# EAGLE board VNA (EAGLE 9.3.1), part 1 of 4
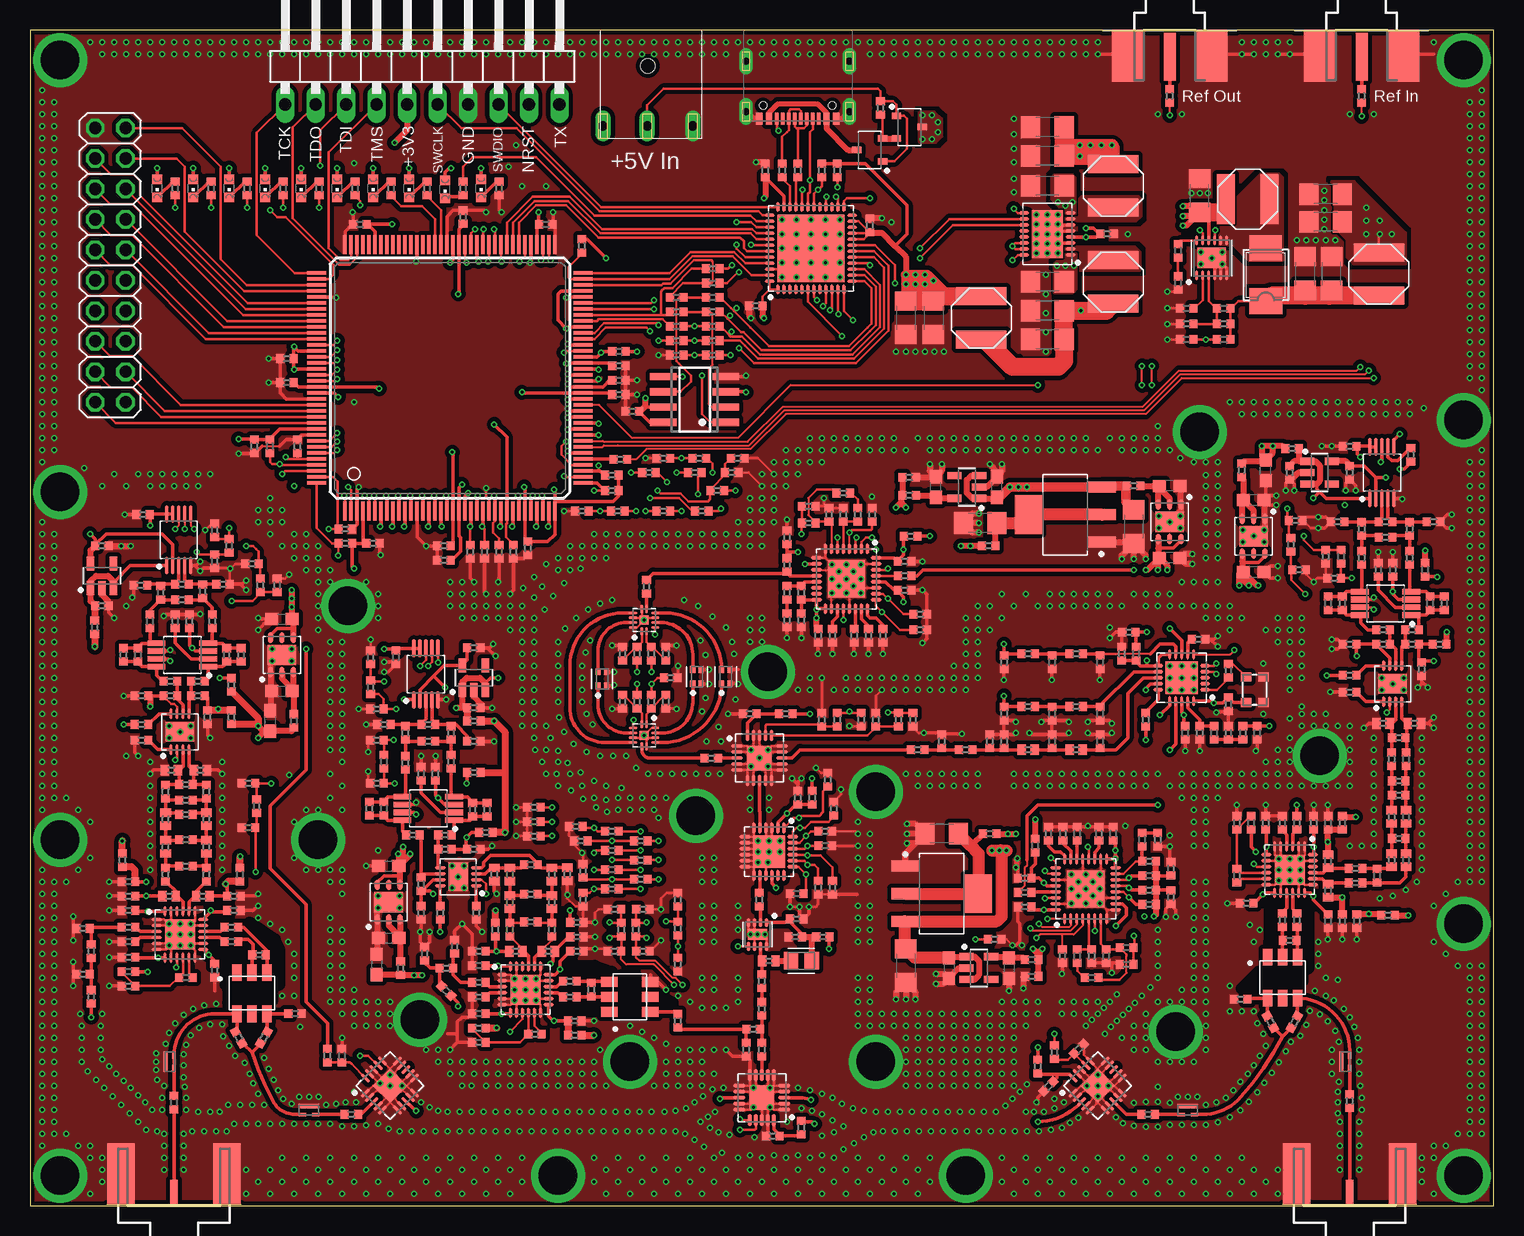
[diagram p0: board, top side]
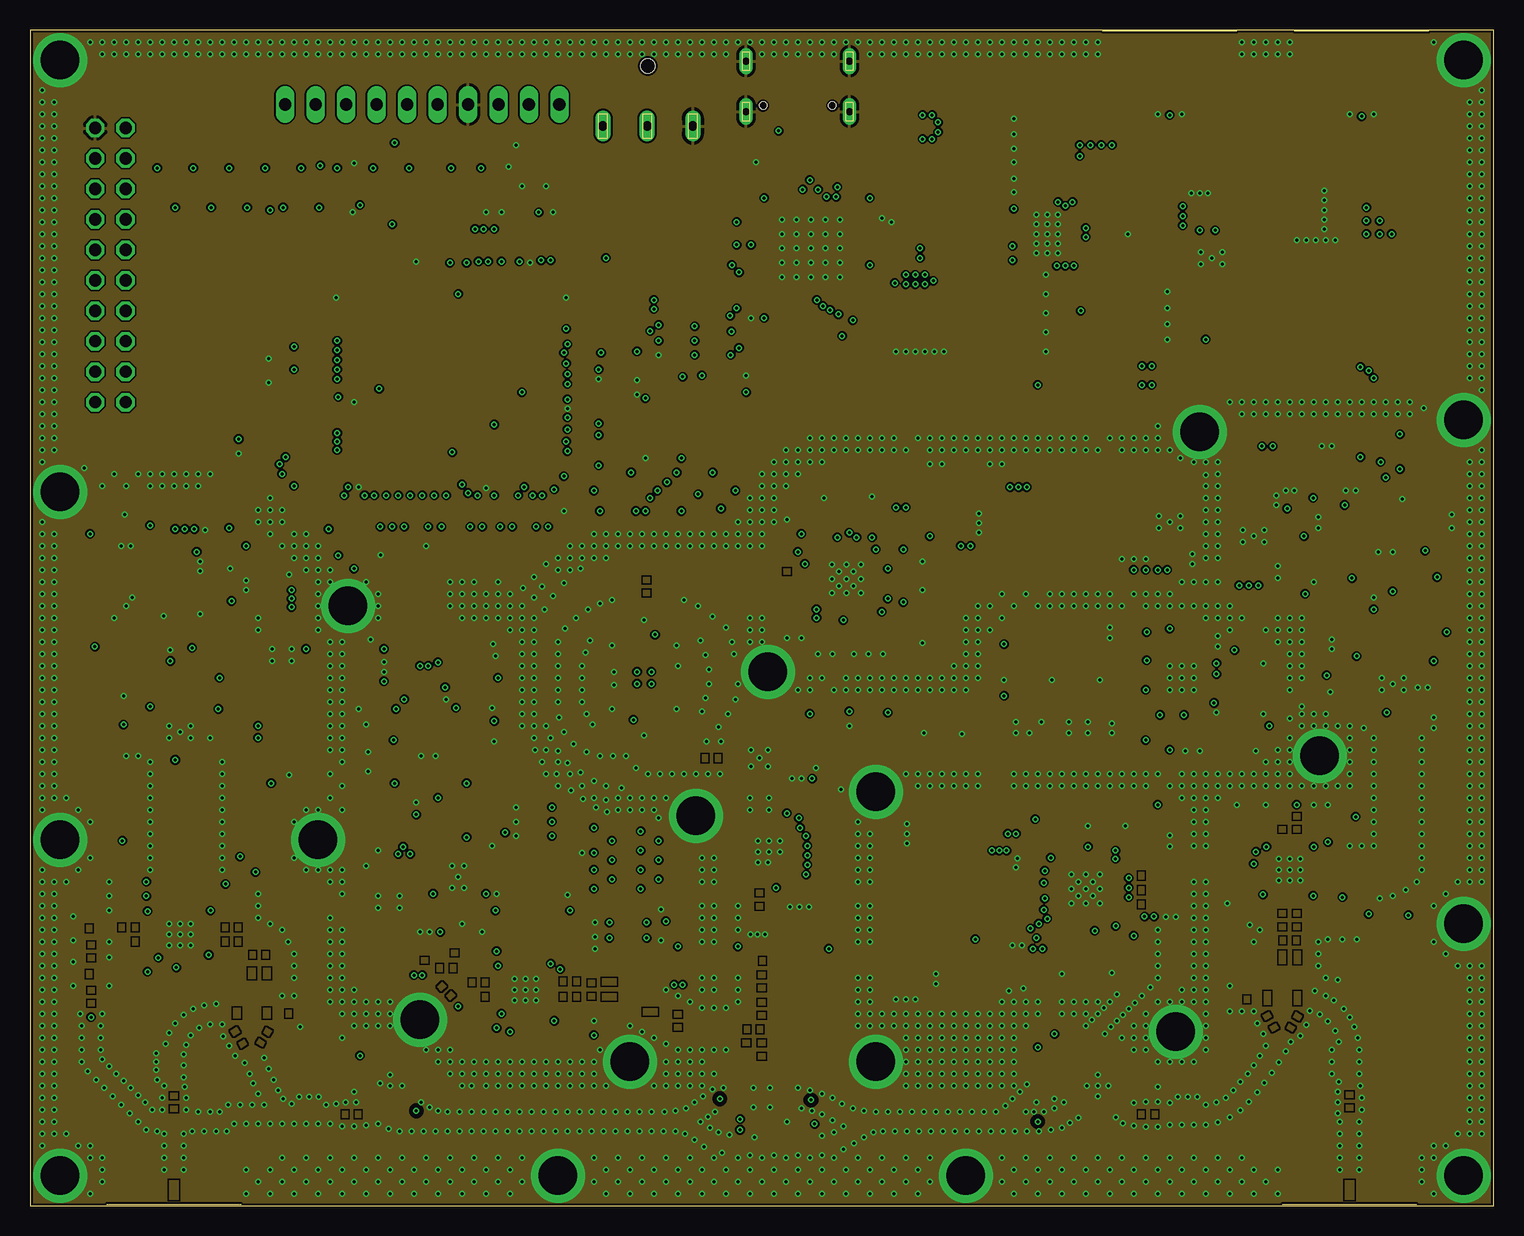
[diagram p1: board, inner layer Route2]
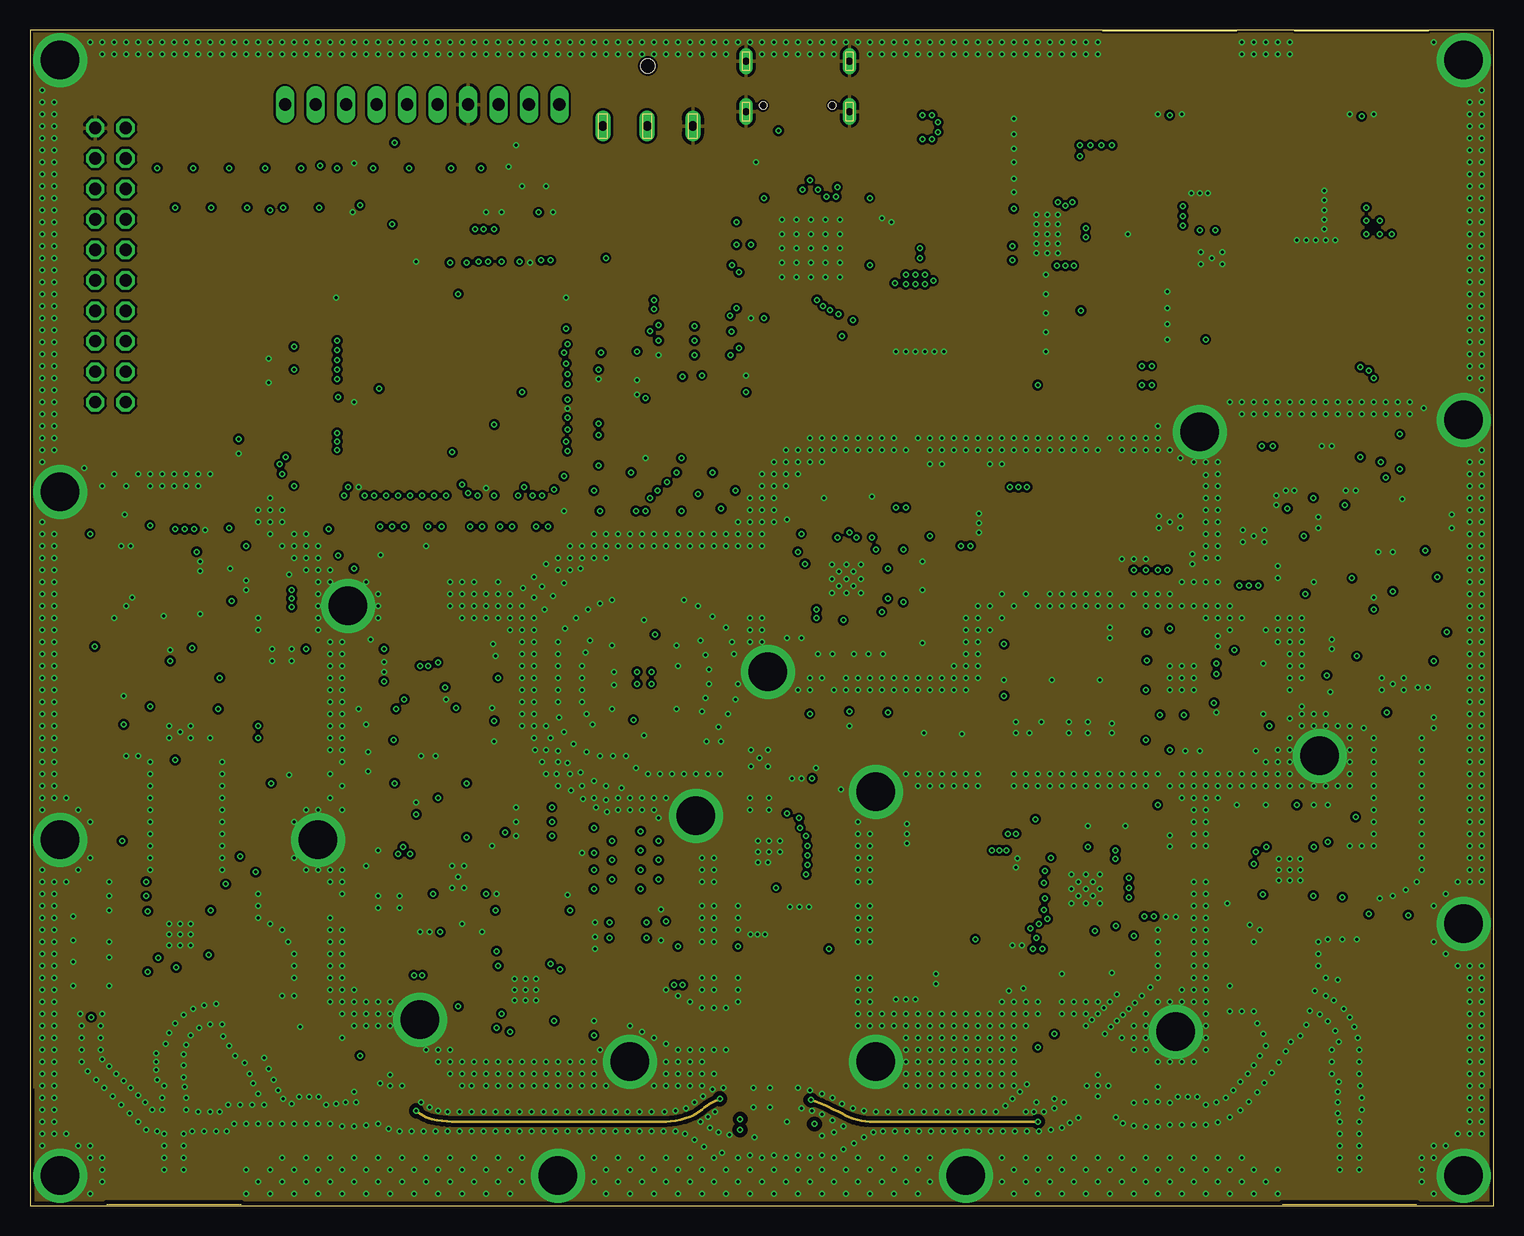
[diagram p2: board, inner layer Route3]
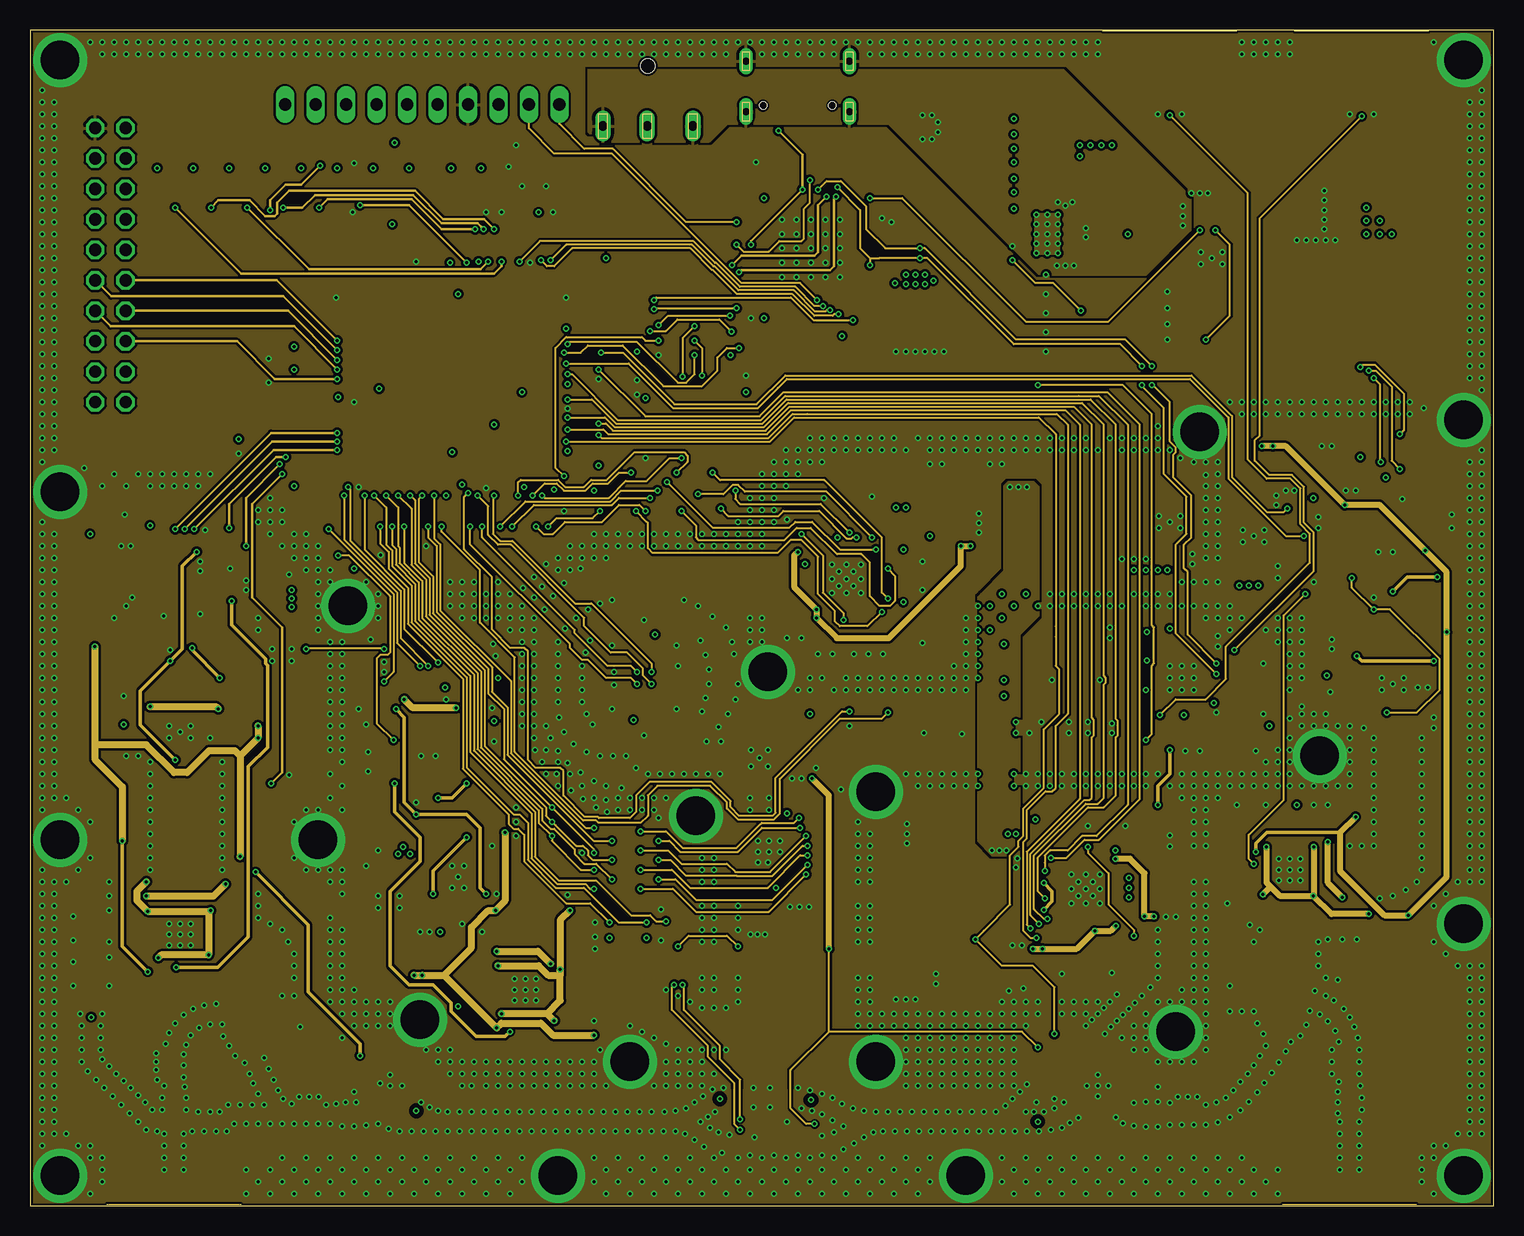
[diagram p3: board, inner layer Route14]
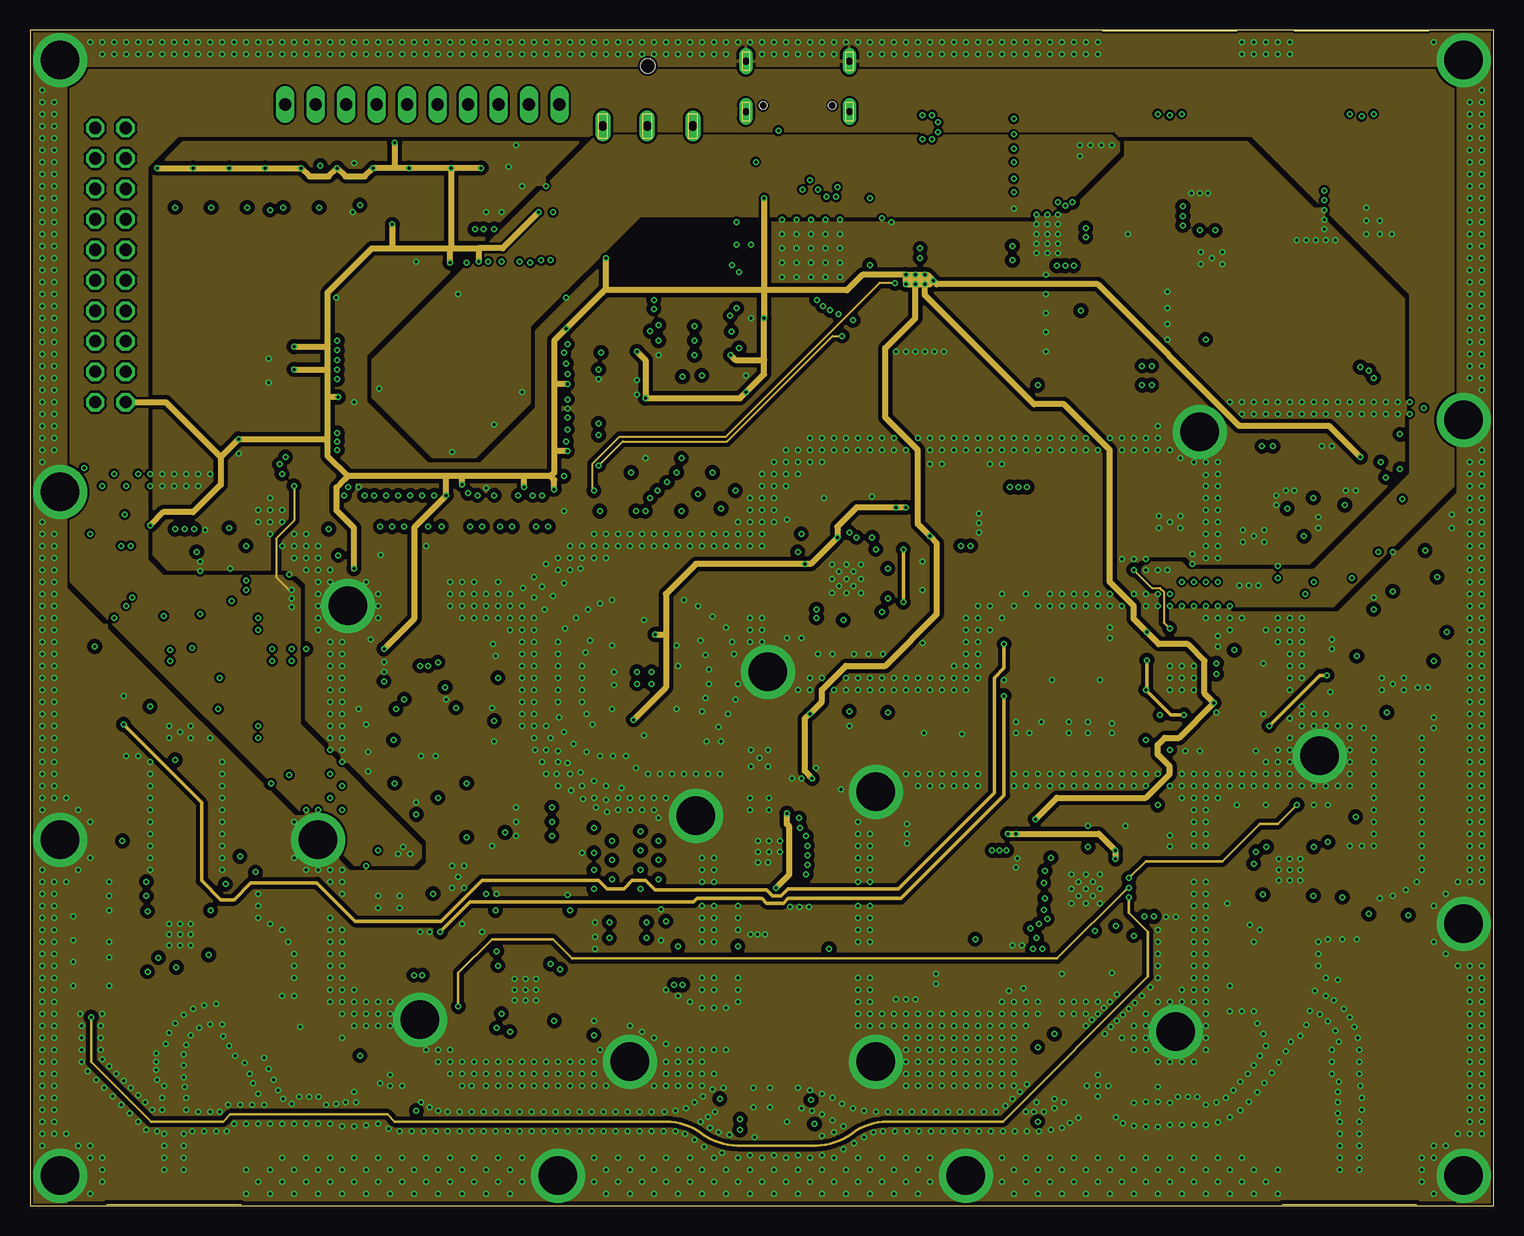
[diagram p4: board, inner layer Route15]
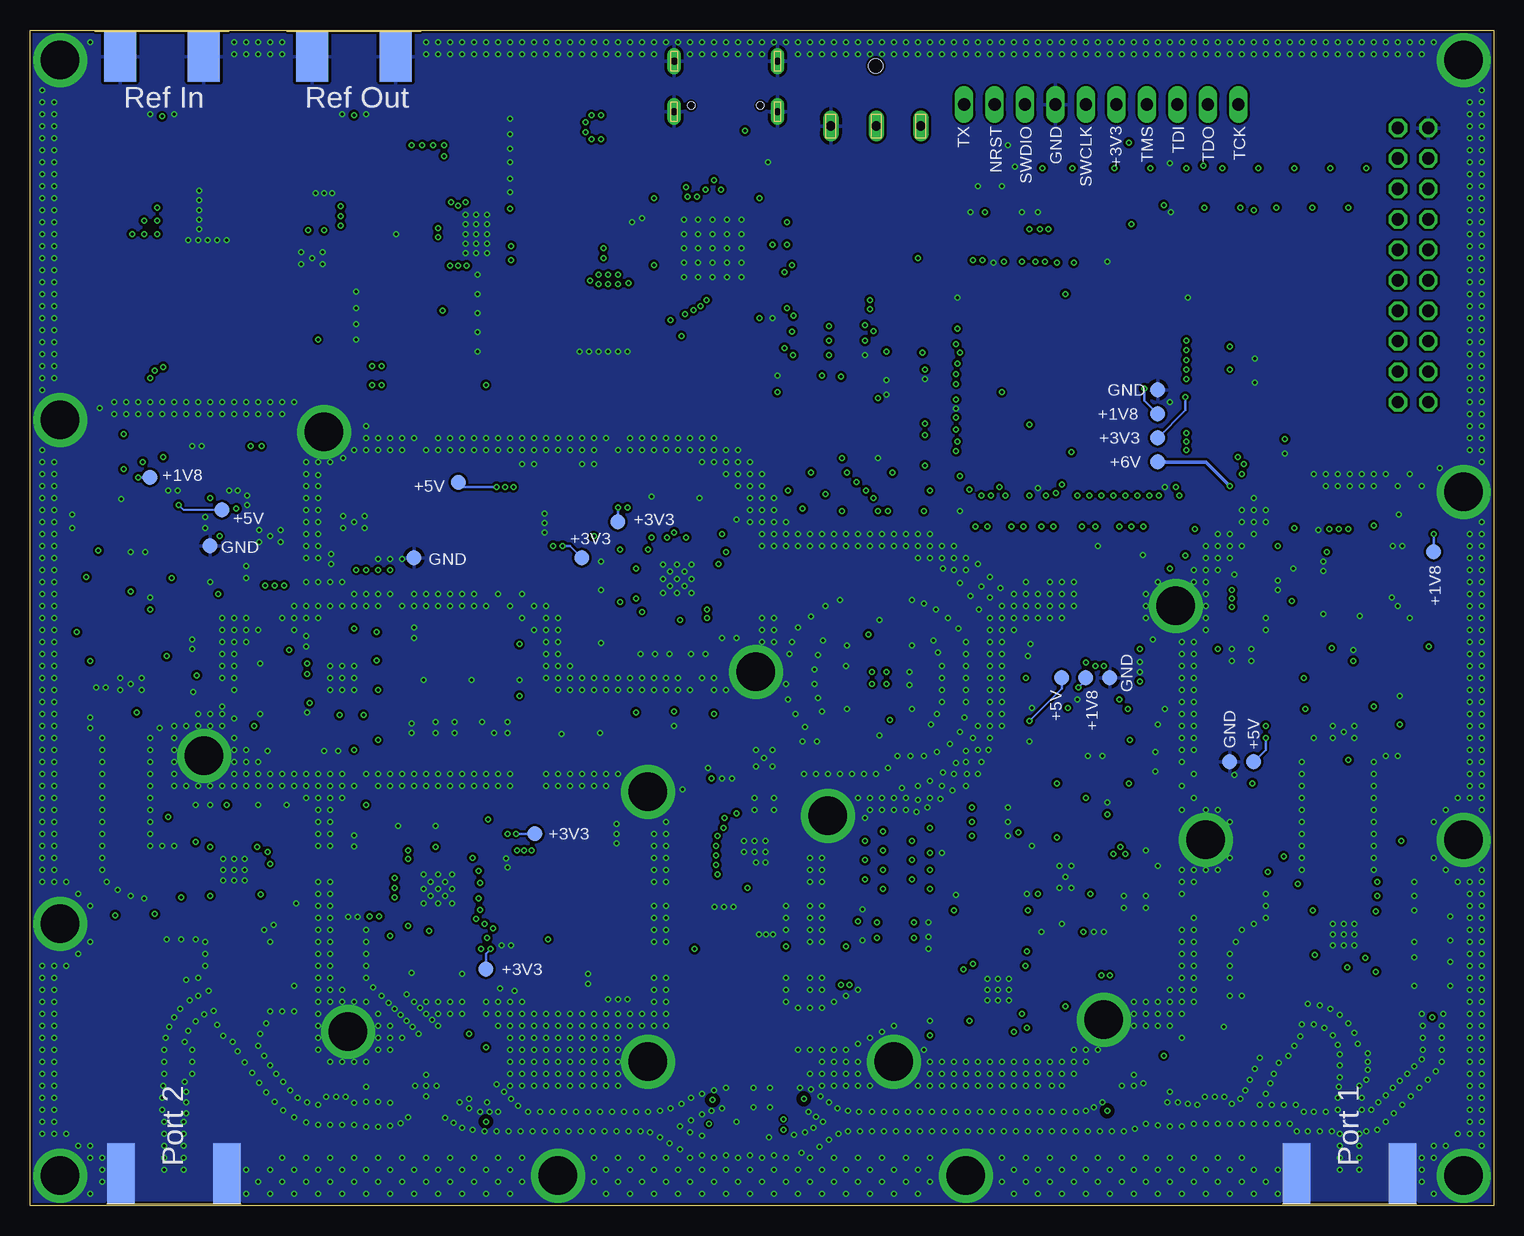
[diagram p5: board, bottom side, seen from below]

Size 122 x 98 mm. Coordinates in mm from the lower left corner, seen from the top.
Outline: 0,0 122,0 122,98 0,98 0,0
Copper layers (1+2*3+14*15+16): Top 0.035mm / dielectric 0.18mm / Route2 0.0175mm / dielectric 0.5mm / Route3 0.0175mm / dielectric 0.18mm / Route14 0.0175mm / dielectric 0.5mm / Route15 0.0175mm / dielectric 0.18mm / Bottom 0.035mm
Design rules "JLCPCB4L_7628 *": minimum track width 0.15mm, minimum drill 0.25mm, track to track 0.15mm, track to pad 0.15mm, pad to pad 0.15mm, via to via 0.15mm, smd to smd 0mil, copper to edge 0.2mm, drill to drill 0.2mm, minimum pad ring 10mil, minimum via ring 0.125mm, stop-mask expansion 4mil, vias tented up to drill 0mil, thermal gap 10mil
tRestrict: 19 lines

## Footprints (pad centres in the part's own frame; a part is rotated, then mirrored left to right if it is on the bottom)
C1206 = smd 1.6 x 1.8: 1 -1.4,0; 2 1.4,0
C0402 = smd 0.67 x 0.72: 1 -0.56,0; 2 0.56,0
C0603 = smd 1.1 x 1: 1 -0.85,0; 2 0.85,0
SMB = smd 2.159 x 2.743: A 2.108,-0.102; C -2.311,-0.127
SON50P300X300X90-13T170X240N = smd 0.811 x 0.25: 1 -1.451,1.25; 2 -1.451,0.75; 3 -1.451,0.25; 4 -1.451,-0.25; 5 -1.451,-0.75; 6 -1.451,-1.25; 7 1.451,-1.25; 8 1.451,-0.75; 9 1.451,-0.25; 10 1.451,0.25; 11 1.451,0.75; 12 1.451,1.25 | smd 1.7 x 2.4: 13 0,0
SON50P400X500X80-17T260X400N = smd 0.86 x 0.27: 1 -1.935,1.75; 2 -1.935,1.25; 3 -1.935,0.75; 4 -1.935,0.25; 5 -1.935,-0.25; 6 -1.935,-0.75; 7 -1.935,-1.25; 8 -1.935,-1.75; 9 1.935,-1.75; 10 1.935,-1.25; 11 1.935,-0.75; 12 1.935,-0.25; 13 1.935,0.25; 14 1.935,0.75; 15 1.935,1.25; 16 1.935,1.75 | smd 2.6 x 4: 17 0,0
SON95P300X300X100-7T170X240N = smd 0.86 x 0.397: 1 -1.435,0.95; 2 -1.435,0; 3 -1.435,-0.95; 4 1.435,-0.95; 5 1.435,0; 6 1.435,0.95 | smd 1.7 x 2.4: 7 0,0
QFN50P400X400X90-21T270N = smd 0.838 x 0.27: 1 -1.946,1; 2 -1.946,0.5; 3 -1.946,0; 4 -1.946,-0.5; 5 -1.946,-1; 11 1.946,-1; 12 1.946,-0.5; 13 1.946,0; 14 1.946,0.5; 15 1.946,1 | smd 0.27 x 0.838: 6 -1,-1.946; 7 -0.5,-1.946; 8 0,-1.946; 9 0.5,-1.946; 10 1,-1.946; 16 1,1.946; 17 0.5,1.946; 18 0,1.946; 19 -0.5,1.946; 20 -1,1.946 | smd 2.7 x 2.7: 21 0,0
SOT230P700X180-4 = smd 2.265 x 0.929: 1 -3.073,2.3; 2 -3.073,0; 3 -3.073,-2.3 | smd 2.265 x 3.229: 4 3.073,0
SOT95P240X110-5 = smd 1.18 x 0.609: 1 -1.024,0.95; 2 -1.024,0; 3 -1.024,-0.95; 4 1.024,-0.95; 5 1.024,0.95
QFN50P500X500X80-33T310 = smd 0.937 x 0.27: 1 -2.487,1.75; 2 -2.487,1.25; 3 -2.487,0.75; 4 -2.487,0.25; 5 -2.487,-0.25; 6 -2.487,-0.75; 7 -2.487,-1.25; 8 -2.487,-1.75; 17 2.487,-1.75; 18 2.487,-1.25; 19 2.487,-0.75; 20 2.487,-0.25; 21 2.487,0.25; 22 2.487,0.75; 23 2.487,1.25; 24 2.487,1.75 | smd 0.27 x 0.937: 9 -1.75,-2.487; 10 -1.25,-2.487; 11 -0.75,-2.487; 12 -0.25,-2.487; 13 0.25,-2.487; 14 0.75,-2.487; 15 1.25,-2.487; 16 1.75,-2.487; 25 1.75,2.487; 26 1.25,2.487; 27 0.75,2.487; 28 0.25,2.487; 29 -0.25,2.487; 30 -0.75,2.487; 31 -1.25,2.487; 32 -1.75,2.487 | smd 3.1 x 3.1: 33 0,0
QFN40P180X180X55-13T76N = smd 0.688 x 0.2: 1 -0.921,0.2; 2 -0.921,-0.2; 7 0.921,-0.2; 8 0.921,0.2 | smd 0.2 x 0.688: 3 -0.6,-0.921; 4 -0.2,-0.921; 5 0.2,-0.921; 6 0.6,-0.921; 9 0.6,0.921; 10 0.2,0.921; 11 -0.2,0.921; 12 -0.6,0.921 | smd 0.76 x 0.76: 13 0,0
QFN50P400X400X75-21T206 = smd 0.962 x 0.282: 1 -1.875,1; 2 -1.875,0.5; 3 -1.875,0; 4 -1.875,-0.5; 5 -1.875,-1; 11 1.875,-1; 12 1.875,-0.5; 13 1.875,0; 14 1.875,0.5; 15 1.875,1 | smd 0.282 x 0.962: 6 -1,-1.875; 7 -0.5,-1.875; 8 0,-1.875; 9 0.5,-1.875; 10 1,-1.875; 16 1,1.875; 17 0.5,1.875; 18 0,1.875; 19 -0.5,1.875; 20 -1,1.875 | smd 2.06 x 2.06: 21 0,0
QFN50P400X400X75-25T270 = smd 0.96 x 0.27: 1 -1.985,1.25; 2 -1.985,0.75; 3 -1.985,0.25; 4 -1.985,-0.25; 5 -1.985,-0.75; 6 -1.985,-1.25; 13 1.985,-1.25; 14 1.985,-0.75; 15 1.985,-0.25; 16 1.985,0.25; 17 1.985,0.75; 18 1.985,1.25 | smd 0.27 x 0.96: 7 -1.25,-1.985; 8 -0.75,-1.985; 9 -0.25,-1.985; 10 0.25,-1.985; 11 0.75,-1.985; 12 1.25,-1.985; 19 1.25,1.985; 20 0.75,1.985; 21 0.25,1.985; 22 -0.25,1.985; 23 -0.75,1.985; 24 -1.25,1.985 | smd 2.7 x 2.7: 25 0,0
SON50P200X200X80-9T90X160N = smd 0.76 x 0.279: 1 -0.985,0.75; 2 -0.985,0.25; 3 -0.985,-0.25; 4 -0.985,-0.75; 5 0.985,-0.75; 6 0.985,-0.25; 7 0.985,0.25; 8 0.985,0.75 | smd 0.9 x 1.6: 9 0,0
SON50P300X300X80-9T165X238 = smd 0.917 x 0.27: 1 -1.497,0.75; 2 -1.497,0.25; 3 -1.497,-0.25; 4 -1.497,-0.75; 5 1.497,-0.75; 6 1.497,-0.25; 7 1.497,0.25; 8 1.497,0.75 | smd 1.65 x 2.38: 9 0,0
SOP65P490X110-8N = smd 1.471 x 0.481: 1 -2.15,0.975; 2 -2.15,0.325; 3 -2.15,-0.325; 4 -2.15,-0.975; 5 2.15,-0.975; 6 2.15,-0.325; 7 2.15,0.325; 8 2.15,0.975
QFN50P400X400X100-25T250N = smd 0.86 x 0.264: 1 -1.935,1.25; 2 -1.935,0.75; 3 -1.935,0.25; 4 -1.935,-0.25; 5 -1.935,-0.75; 6 -1.935,-1.25; 13 1.935,-1.25; 14 1.935,-0.75; 15 1.935,-0.25; 16 1.935,0.25; 17 1.935,0.75; 18 1.935,1.25 | smd 0.264 x 0.86: 7 -1.25,-1.935; 8 -0.75,-1.935; 9 -0.25,-1.935; 10 0.25,-1.935; 11 0.75,-1.935; 12 1.25,-1.935; 19 1.25,1.935; 20 0.75,1.935; 21 0.25,1.935; 22 -0.25,1.935; 23 -0.75,1.935; 24 -1.25,1.935 | smd 2.5 x 2.5: 25 0,0
SOP50P490X110-10N = smd 1.471 x 0.28: 1 -2.15,1; 2 -2.15,0.5; 3 -2.15,0; 4 -2.15,-0.5; 5 -2.15,-1; 6 2.15,-1; 7 2.15,-0.5; 8 2.15,0; 9 2.15,0.5; 10 2.15,1
QFN50P700X700X60-49T560N = smd 0.86 x 0.27: 1 -3.435,2.75; 2 -3.435,2.25; 3 -3.435,1.75; 4 -3.435,1.25; 5 -3.435,0.75; 6 -3.435,0.25; 7 -3.435,-0.25; 8 -3.435,-0.75; 9 -3.435,-1.25; 10 -3.435,-1.75; 11 -3.435,-2.25; 12 -3.435,-2.75; 25 3.435,-2.75; 26 3.435,-2.25; 27 3.435,-1.75; 28 3.435,-1.25; 29 3.435,-0.75; 30 3.435,-0.25; 31 3.435,0.25; 32 3.435,0.75; 33 3.435,1.25; 34 3.435,1.75; 35 3.435,2.25; 36 3.435,2.75 | smd 0.27 x 0.86: 13 -2.75,-3.435; 14 -2.25,-3.435; 15 -1.75,-3.435; 16 -1.25,-3.435; 17 -0.75,-3.435; 18 -0.25,-3.435; 19 0.25,-3.435; 20 0.75,-3.435; 21 1.25,-3.435; 22 1.75,-3.435; 23 2.25,-3.435; 24 2.75,-3.435; 37 2.75,3.435; 38 2.25,3.435; 39 1.75,3.435; 40 1.25,3.435; 41 0.75,3.435; 42 0.25,3.435; 43 -0.25,3.435; 44 -0.75,3.435; 45 -1.25,3.435; 46 -1.75,3.435; 47 -2.25,3.435; 48 -2.75,3.435 | smd 5.6 x 5.6: 49 0,0
PJ-014D = drill 0.8 long: 1 8.25,8; 2 0.75,8; 3 4.55,8 | hole 1.2: 4.5,3
BU-1420701851 = smd 2.1 x 0.6: 1 1,0 | smd 5.08 x 2.286: G@1 2.565,4.42; G@2 2.565,-4.42 | smd 5.08 x 2.286 bottom: G@3 2.565,4.42; G@4 2.565,-4.42
TYPE-C16P = smd 0.52 x 1: 1 -3.2,-0.5; 2 -2.4,-0.5; 11 2.4,-0.5; 12 3.2,-0.5 | smd 0.27 x 1: 3 -1.75,-0.5; 4 -1.25,-0.5; 5 -0.75,-0.5; 6 -0.25,-0.5; 7 0.25,-0.5; 8 0.75,-0.5; 9 1.25,-0.5; 10 1.75,-0.5 | drill 0.6 pad 1.1 long: M1 -4.3,-5.3; M2 -4.32,-1.1; M3 4.32,-5.3; M4 4.32,-1.1 | hole 0.6: -2.89,-1.6; 2.89,-1.6
1X10/90 = drill 1.016 long: 1 -11.43,-3.81; 2 -8.89,-3.81; 3 -6.35,-3.81; 4 -3.81,-3.81; 5 -1.27,-3.81; 6 1.27,-3.81; 7 3.81,-3.81; 8 6.35,-3.81; 9 8.89,-3.81; 10 11.43,-3.81
2X10 = drill 1.016 octagon: 1 -11.43,-1.27; 2 -11.43,1.27; 3 -8.89,-1.27; 4 -8.89,1.27; 5 -6.35,-1.27; 6 -6.35,1.27; 7 -3.81,-1.27; 8 -3.81,1.27; 9 -1.27,-1.27; 10 -1.27,1.27; 11 1.27,-1.27; 12 1.27,1.27; 13 3.81,-1.27; 14 3.81,1.27; 15 6.35,-1.27; 16 6.35,1.27; 17 8.89,-1.27; 18 8.89,1.27; 19 11.43,-1.27; 20 11.43,1.27
SRN5040 = smd 1.5 x 4.2: P$1 -1.8,0; P$2 1.8,0
R0402 = smd 0.67 x 0.72: 1 -0.56,0; 2 0.56,0
INDC2012X100N = smd 1.196 x 1.465: 1 -0.86,0; 2 0.86,0
L0402 = smd 0.7 x 0.9: 1 -0.548,0; 2 0.548,0
CHIPLED_0603 = smd 0.8 x 0.8: A 0,-0.75; C 0,0.75
FILTRDFN160X84X70-4N = smd 0.571 x 0.424: 1 -0.6,0.35; 2 -0.6,-0.35; 3 0.6,-0.35; 4 0.6,0.35
SOTFL95P240X80-3N = smd 0.788 x 0.541: 1 -1.07,0.95; 2 -1.07,-0.95; 3 1.07,0
PAT0816 = smd 0.6 x 0.3: 1 -0.55,0.35; 2 0.55,0.35 | smd 1.7 x 0.35: 3 0,-0.35
EASTEVER_BALUN = smd 1.4 x 0.8: 1 -1.715,-1.25; 2 -1.715,0; 3 -1.715,1.25; 4 1.715,1.25; 5 1.715,0; 6 1.715,-1.25
B1,27 = smd 1.27 x 1.27: TP 0,0
SO08 = smd 0.6 x 2.2: 1 -1.905,-2.6; 2 -0.635,-2.6; 3 0.635,-2.6; 4 1.905,-2.6; 5 1.905,2.6; 6 0.635,2.6; 7 -0.635,2.6; 8 -1.905,2.6
TQ144 = smd 1.6 x 0.3: P1 -11.1,8.75; P2 -11.1,8.25; P3 -11.1,7.75; P4 -11.1,7.25; P5 -11.1,6.75; P6 -11.1,6.25; P7 -11.1,5.75; P8 -11.1,5.25; P9 -11.1,4.75; P10 -11.1,4.25; P11 -11.1,3.75; P12 -11.1,3.25; P13 -11.1,2.75; P14 -11.1,2.25; P15 -11.1,1.75; P16 -11.1,1.25; P17 -11.1,0.75; P18 -11.1,0.25; P19 -11.1,-0.25; P20 -11.1,-0.75; P21 -11.1,-1.25; P22 -11.1,-1.75; P23 -11.1,-2.25; P24 -11.1,-2.75; P25 -11.1,-3.25; P26 -11.1,-3.75; P27 -11.1,-4.25; P28 -11.1,-4.75; P29 -11.1,-5.25; P30 -11.1,-5.75; P31 -11.1,-6.25; P32 -11.1,-6.75; P33 -11.1,-7.25; P34 -11.1,-7.75; P35 -11.1,-8.25; P36 -11.1,-8.75; P73 11.1,-8.75; P74 11.1,-8.25; P75 11.1,-7.75; P76 11.1,-7.25; P77 11.1,-6.75; P78 11.1,-6.25; P79 11.1,-5.75; P80 11.1,-5.25; P81 11.1,-4.75; P82 11.1,-4.25; P83 11.1,-3.75; P84 11.1,-3.25; P85 11.1,-2.75; P86 11.1,-2.25; P87 11.1,-1.75; P88 11.1,-1.25; P89 11.1,-0.75; P90 11.1,-0.25; P91 11.1,0.25; P92 11.1,0.75; P93 11.1,1.25; P94 11.1,1.75; P95 11.1,2.25; P96 11.1,2.75; P97 11.1,3.25; P98 11.1,3.75; P99 11.1,4.25; P100 11.1,4.75; P101 11.1,5.25; P102 11.1,5.75; P103 11.1,6.25; P104 11.1,6.75; P105 11.1,7.25; P106 11.1,7.75; P107 11.1,8.25; P108 11.1,8.75 | smd 0.3 x 1.6: P37 -8.75,-11.1; P38 -8.25,-11.1; P39 -7.75,-11.1; P40 -7.25,-11.1; P41 -6.75,-11.1; P42 -6.25,-11.1; P43 -5.75,-11.1; P44 -5.25,-11.1; P45 -4.75,-11.1; P46 -4.25,-11.1; P47 -3.75,-11.1; P48 -3.25,-11.1; P49 -2.75,-11.1; P50 -2.25,-11.1; P51 -1.75,-11.1; P52 -1.25,-11.1; P53 -0.75,-11.1; P54 -0.25,-11.1; P55 0.25,-11.1; P56 0.75,-11.1; P57 1.25,-11.1; P58 1.75,-11.1; P59 2.25,-11.1; P60 2.75,-11.1; P61 3.25,-11.1; P62 3.75,-11.1; P63 4.25,-11.1; P64 4.75,-11.1; P65 5.25,-11.1; P66 5.75,-11.1; P67 6.25,-11.1; P68 6.75,-11.1; P69 7.25,-11.1; P70 7.75,-11.1; P71 8.25,-11.1; P72 8.75,-11.1; P109 8.75,11.1; P110 8.25,11.1; P111 7.75,11.1; P112 7.25,11.1; P113 6.75,11.1; P114 6.25,11.1; P115 5.75,11.1; P116 5.25,11.1; P117 4.75,11.1; P118 4.25,11.1; P119 3.75,11.1; P120 3.25,11.1; P121 2.75,11.1; P122 2.25,11.1; P123 1.75,11.1; P124 1.25,11.1; P125 0.75,11.1; P126 0.25,11.1; P127 -0.25,11.1; P128 -0.75,11.1; P129 -1.25,11.1; P130 -1.75,11.1; P131 -2.25,11.1; P132 -2.75,11.1; P133 -3.25,11.1; P134 -3.75,11.1; P135 -4.25,11.1; P136 -4.75,11.1; P137 -5.25,11.1; P138 -5.75,11.1; P139 -6.25,11.1; P140 -6.75,11.1; P141 -7.25,11.1; P142 -7.75,11.1; P143 -8.25,11.1; P144 -8.75,11.1
J502-ND-142-0711-821/826 = smd 4 x 1: 1 2.115,0 | smd 4.191 x 2.667: G@1 2.115,3.495; G@2 2.115,-3.495 | smd 4.191 x 2.667 bottom: G@3 2.115,3.495; G@4 2.115,-3.495
2.5X2.0_KXO-86-TCXO = smd 0.75 x 0.9: 1 -1.05,-0.725; 2 1.05,-0.725; 3 1.05,0.725; 4 -1.05,0.725

## Placement (x,y rotation side)
C1  10u  [C1206]  97.5,84.2 90 top
C2  10u  [C1206]  84.8,77 180 top
C3  10u  [C1206]  84.8,85 180 top
C4  100n  [C0402]  96.4,74.8 0 top
C5  10n  [C0402]  95.7,76.9 90 top
C6  100n  [C0402]  89.8,81 180 top
C7  10u  [C1206]  84.8,89.9 180 top
C8  10u  [C1206]  84.8,74.6 180 top
C9  100p  [C0402]  99.5,74.8 180 top
C10  10u  [C1206]  84.8,87.5 180 top
C11  10u  [C1206]  84.8,72.2 180 top
C12  10u  [C1206]  108.5,77.7 90 top
C13  10u  [C1206]  106.3,77.7 90 top
C14  10u  [C1206]  75.3,74 270 top
C15  10u  [C1206]  73,74 270 top
C16  10u  [C1206]  108,82 180 top
C17  10u  [C1206]  108,84.3 180 top
C18  1u  [C0603]  21,48.9 0 top
C19  1u  [C0603]  102,52.8 180 top
C20  1u  [C0603]  29.9,28.3 0 top
C21  1u  [C0603]  95,54 180 top
C22  4u7  [C0603]  21,42.9 0 top
C23  4u7  [C0603]  102,58.8 180 top
C24  4u7  [C0603]  29.9,22.3 0 top
C25  4u7  [C0603]  95,60 180 top
C26  1u  [C0603]  20,40.4 270 top
C27  1u  [C0603]  103,61.3 90 top
C28  1u  [C0603]  28.9,20.1 270 top
C29  100n  [C0402]  91.6,47.8 0 top
C30  10n  [C0402]  111,92.5 270 top
C31  100n  [C0402]  99.9,41.8 90 top
C32  100n  [C0402]  91,46 270 top
C33  100n  [C0402]  96.3,39.4 90 top
C34  100n  [C0402]  99.9,44.6 90 top
C35  DNP  [C0402]  97.5,39.4 270 top
C36  DNP  [C0402]  89.2,41 270 top
C37  DNP  [C0402]  89.2,45.3 270 top
C38  56p  [C0402]  89.2,38.7 90 top
C39  10n  [C0402]  95,92.5 90 top
C40  DNP  [C0402]  99.9,39.4 90 top
C41  DNP  [C0402]  85.2,41 270 top
C42  DNP  [C0402]  85.2,45.3 270 top
C43  180p  [C0402]  85.2,38.7 90 top
C44  DNP  [C0402]  102.3,39.4 270 top
C45  DNP  [C0402]  81.2,41 270 top
C46  DNP  [C0402]  81.2,45.3 270 top
C47  56p  [C0402]  81.2,38.7 90 top
C48  100n  [C0402]  74,38 0 top
C49  10u  [C1206]  92,56.6 270 top
C50  1u  [C0603]  80.6,59.9 90 top
C51  10n  [C0402]  72.9,52.5 180 top
C52  1u  [C0603]  75.5,59.9 90 top
C53  10u  [C1206]  79.2,56.9 180 top
C54  100n  [C0402]  72.9,51.3 0 top
C55  100n  [C0402]  72.9,53.7 0 top
C56  100n  [C0402]  65.7,47.5 270 top
C57  100n  [C0402]  73.3,60.7 0 top
C58  1u  [C0402]  71.1,47.5 270 top
C59  1u  [C0402]  66.9,47.5 270 top
C60  1u  [C0402]  69.9,47.5 270 top
C61  100n  [C0402]  64.3,48.8 270 top
C62  100n  [C0402]  63.1,51.1 90 top
C63  180p  [C0402]  66.6,57.6 90 top
C64  100n  [C0402]  63.1,55.7 90 top
C65  100n/RF  [C0402]  51.4,51.6 270 top
C66  3n3  [C0402]  67.8,59.4 0 top
C67  18p  [C0402]  64.9,58.3 180 top
C68  100n/RF  [C0402]  56.8,37.3 0 top
C69  100n  [C0402]  60,41 180 top
C70  100n  [C0402]  64,34 90 top
C71  100n/RF  [C0402]  60.8,25.5 270 top
C72  100n  [C0402]  63.9,23.9 0 top
C73  100n  [C0402]  63.8,22.4 180 top
C74  100n/RF  [C0402]  61,18.7 270 top
C75  100n  [C0402]  61.9,5.8 180 top
C76  100n  [C0402]  26,12.5 90 top
C77  100n  [C0402]  84.9,9.94 225 top
C78  10u  [C1206]  73,20 270 top
C79  1u  [C0603]  76.6,19.8 270 top
C80  10n  [C0402]  82.9,26.1 0 top
C81  1u  [C0603]  81.6,19.8 270 top
C82  10u  [C1206]  76,31 180 top
C83  100n  [C0402]  82.9,27.3 180 top
C84  100n  [C0402]  82.9,24.9 180 top
C85  100n  [C0402]  90.3,31 90 top
C86  100n  [C0402]  83.5,19.1 180 top
C87  1u  [C0402]  84.9,31 90 top
C88  1u  [C0402]  89.1,31 90 top
C89  1u  [C0402]  86.1,31 90 top
C90  180p  [C0402]  89.7,20.8 270 top
C91  100n  [C0402]  95.1,25.7 270 top
C92  3n3  [C0402]  88.5,19 180 top
C93  10n  [C0402]  92.7,30.5 270 top
C94  100n  [C0402]  95.1,28.1 90 top
C95  18p  [C0402]  91.4,20.1 0 top
C96  100n/RF  [C0402]  26.8,7.6 180 top
C97  100n  [C0402]  9.3,38.8 0 top
C98  100n  [C0402]  9.3,40.1 0 top
C99  100n/RF  [C0402]  12,8.6 90 top
C100  1u  [C0402]  11.7,43.7 180 top
C101  1u  [C0402]  14,43.7 0 top
C102  100n  [C0402]  14.8,40.7 90 top
C103  100n  [C0402]  9.3,42.5 0 top
C104  10n  [C0402]  8.2,20.7 180 top
C105  10n  [C0402]  8.2,24.6 180 top
C106  10n  [C0402]  15.4,19.6 270 top
C107  DNP  [C0402]  19.1,20.9 180 top
C108  1u  [C0402]  8.2,27 180 top
C109  100n/RF  [C0402]  16.8,22 180 top
C110  100n/RF  [C0402]  16.8,23.2 180 top
C111  10n  [C0402]  17,24.6 0 top
C112  DNP  [C0402]  7.8,45.9 90 top
C113  DNP  [C0402]  17.6,45.9 270 top
C114  100n  [C0402]  8.2,23.2 0 top
C115  100n  [C0402]  13.3,48.7 270 top
C116  100n  [C0402]  12.1,48.7 90 top
C117  100n  [C0402]  8.2,22 180 top
C118  100n  [C0402]  8.2,18.3 0 top
C119  100n  [C0402]  8.2,25.8 180 top
C120  10n  [C0402]  14.7,27.6 90 top
C121  330p  [C0402]  12.65,50.5 0 top
C122  100n  [C0402]  17,25.8 0 top
C123  10n  [C0402]  11.3,27.6 90 top
C124  120p  [C0402]  13,28.3 180 top
C125  330p  [C0402]  9.2,51.7 0 top
C126  330p  [C0402]  12.65,51.8 0 top
C127  330p  [C0402]  16.1,51.8 0 top
C128  150p  [C0402]  13,30.5 180 top
C129  1u  [C0402]  6,50 0 top
C130  33p  [C0402]  13,32.6 180 top
C131  1u  [C0402]  6,55 0 top
C132  100n  [C0402]  9.4,57.6 0 top
C133  100n/RF  [C0402]  93.2,7.6 0 top
C134  100n  [C0402]  110,42.8 0 top
C135  100n  [C0402]  110,44.2 0 top
C136  100n/RF  [C0402]  110,8.7 90 top
C137  1u  [C0402]  112.8,48 180 top
C138  1u  [C0402]  115.2,48 0 top
C139  100n  [C0402]  110,46.8 0 top
C140  100n  [C0402]  116,44.7 90 top
C141  10n  [C0402]  101.4,25.2 180 top
C142  10n  [C0402]  103,31.9 90 top
C143  10n  [C0402]  107,31.9 90 top
C144  DNP  [C0402]  105,22.1 180 top
C145  1u  [C0402]  110.6,23.7 270 top
C146  100n/RF  [C0402]  104.4,23.8 90 top
C147  100n/RF  [C0402]  105.6,23.8 90 top
C148  10n  [C0402]  108.2,23.7 270 top
C149  DNP  [C0402]  109.4,50.2 90 top
C150  DNP  [C0402]  117.9,50.2 270 top
C151  100n  [C0402]  105.6,31.9 270 top
C152  100n  [C0402]  113.6,53 270 top
C153  100n  [C0402]  112.4,53 90 top
C154  100n  [C0402]  104.4,31.9 90 top
C155  100n  [C0402]  100.6,31.9 270 top
C156  100n  [C0402]  109.4,23.7 270 top
C157  10n  [C0402]  110.5,26.9 0 top
C158  330p  [C0402]  113,55.7 0 top
C159  100n  [C0402]  108.2,31.9 90 top
C160  10n  [C0402]  110.5,28.1 0 top
C161  120p  [C0402]  112.3,27.5 90 top
C162  330p  [C0402]  109,57 0 top
C163  330p  [C0402]  113,57 0 top
C164  330p  [C0402]  117,57 0 top
C165  150p  [C0402]  114.1,30.6 180 top
C166  1u  [C0402]  105,61.1 270 top
C167  33p  [C0402]  114.1,34.2 180 top
C168  1u  [C0402]  110,61.1 270 top
C169  100n  [C0402]  110,63.3 0 top
C170  100n/RF  [C0402]  54,15.4 90 top
C171  10n  [C0402]  37.4,20 180 top
C172  10n  [C0402]  45.6,21.2 0 top
C173  DNP  [C0402]  28.3,33.1 90 top
C174  DNP  [C0402]  38.1,33 270 top
C175  10n  [C0402]  45.4,15.4 0 top
C176  DNP  [C0402]  46.8,18 270 top
C177  1u  [C0402]  45.6,23.6 0 top
C178  100n/RF  [C0402]  45,17.4 180 top
C179  100n/RF  [C0402]  45,18.7 180 top
C180  10n  [C0402]  37.4,16 180 top
C181  100n  [C0402]  33.8,36 270 top
C182  100n  [C0402]  32.6,36 90 top
C183  100n  [C0402]  37.4,18.6 0 top
C184  330p  [C0402]  33.2,38.7 0 top
C185  100n  [C0402]  37.4,17.4 180 top
C186  100n  [C0402]  37.4,13.6 0 top
C187  330p  [C0402]  29.5,40.1 0 top
C188  330p  [C0402]  33.2,40.1 0 top
C189  330p  [C0402]  37,38.7 0 top
C190  100n  [C0402]  37.4,21.2 180 top
C191  10n  [C0402]  43.5,23 90 top
C192  10n  [C0402]  40,23 90 top
C193  100n  [C0402]  45.6,22.4 0 top
C194  120p  [C0402]  41.75,23.65 180 top
C195  1u  [C0402]  37,41.5 0 top
C196  150p  [C0402]  41.75,25.95 180 top
C197  33p  [C0402]  41.76,28.42 180 top
C198  1u  [C0402]  37,46.5 0 top
C199  100n  [C0402]  37.2,24.4 90 top
C200  100n  [C0402]  34.2,24.4 90 top
C201  100n  [C0402]  30.5,45.7 90 top
C202  1u  [C0402]  31.9,30.9 180 top
C203  1u  [C0402]  34.6,30.9 0 top
C204  100n  [C0402]  37,29.7 180 top
C205  100n  [C0402]  32.6,24.4 90 top
C206  100n  [C0402]  60.5,75 180 top
C207  100n  [C0402]  70,81.7 90 top
C208  100n  [C0402]  61.3,86.3 90 top
C209  100n  [C0402]  50.2,66.2 180 top
C210  100n  [C0402]  34.5,53.8 180 top
C211  100n  [C0402]  21.4,68.6 180 top
C212  100n  [C0402]  41.5,54.8 270 top
C213  100n  [C0402]  40.3,54.5 270 top
C214  100n  [C0402]  49.1,68.8 0 top
C215  100n  [C0402]  49.1,67.6 0 top
C216  100n  [C0402]  28.6,55.2 0 top
C217  100n  [C0402]  34.5,55 180 top
C218  100n  [C0402]  18.7,63.3 270 top
C219  100n  [C0402]  36.1,82.4 90 top
C220  100n  [C0402]  43,81.8 0 top
C221  100n  [C0402]  27.5,81.8 180 top
C222  100n  [C0402]  21.4,70.6 180 top
C223  100p  [C0402]  28.4,45.7 90 top
C224  100p  [C0402]  28.9,41.4 180 top
C225  100p  [C0402]  28.9,38.8 180 top
C226  100p  [C0402]  28.9,35.2 180 top
C227  100p  [C0402]  15.4,56.3 90 top
C228  100p  [C0402]  15.4,53.7 270 top
C229  100p  [C0402]  18.5,53.5 180 top
C230  100p  [C0402]  20.6,51.7 90 top
C231  100p  [C0402]  108.7,52.3 180 top
C232  100p  [C0402]  108,54.1 270 top
C233  100p  [C0402]  105.8,53 0 top
C234  100p  [C0402]  105.5,57.1 0 top
C235  100p  [C0402]  80.4,22.2 0 top
C236  100p  [C0402]  87.44,13.06 45 top
C237  100p  [C0402]  48.7,24.7 180 top
C238  100p  [C0402]  48.7,21.2 180 top
C239  100p  [C0402]  51.1,24.7 0 top
C240  100p  [C0402]  51.1,21.2 0 top
C241  100p  [C0402]  18.2,35.2 180 top
C242  100p  [C0402]  18.2,31.5 180 top
C243  100p  [C0402]  54,25.5 90 top
C244  100p  [C0402]  54,20.1 270 top
C245  100p  [C0402]  69.3,40.5 270 top
C246  100p  [C0402]  66,40.5 90 top
C247  100p  [C0402]  73.6,40.5 270 top
C248  100p  [C0402]  70.5,40.5 90 top
C249  100p  [C0402]  45.5,31.6 180 top
C250  100p  [C0402]  66.5,35.5 90 top
C251  100p  [C0402]  45.9,30.4 180 top
C252  100p  [C0402]  67,33.1 90 top
C253  100p  [C0402]  42,33.2 180 top
C254  100p  [C0402]  66.3,31.2 0 top
C255  100p  [C0402]  42,32 180 top
C256  100p  [C0402]  66.3,30 0 top
C257  100p  [C0402]  63.9,26 180 top
C258  100p  [C0402]  46.1,25.5 270 top
C259  100p  [C0402]  65.7,26.5 270 top
C260  100p  [C0402]  46.1,27.9 90 top
C261  100p  [C0402]  66.9,26.5 270 top
C262  100p  [C0402]  42,30.8 180 top
C263  100p  [C0402]  39.1,54.5 270 top
C264  100p  [C0402]  37.9,54.5 270 top
C265  100p  [C0402]  53.4,44 0 top
C266  100p  [C0402]  36.7,54.5 270 top
C267  100p  [C0402]  59,62.3 0 top
C268  100p  [C0402]  70.2,57.6 90 top
C269  100n  [C0402]  5.1,17.4 90 top
C270  100n  [C0402]  34.7,17.9 135 top
C271  100p  [C0402]  52.8,62.3 180 top
C272  100p  [C0402]  74.2,49.3 0 top
C273  100p  [C0402]  46,57.9 180 top
C274  100p  [C0402]  74.2,48 0 top
D1  MBRS2040LT3G  [SMB]  102.9,77.7 90 top
IC1  MIC2253  [SON50P300X300X90-13T170X240N]  98.5,79 90 top
IC2  LM3370SD-4221  [SON50P400X500X80-17T260X400N]  84.8,81 180 top
IC3  LDL212PU50R  [SON95P300X300X100-7T170X240N]  21,45.9 90 top
IC4  LDL212PU50R  [SON95P300X300X100-7T170X240N]  102,55.8 270 top
IC5  LDL212PU50R  [SON95P300X300X100-7T170X240N]  29.9,25.3 90 top
IC6  LDL212PU50R  [SON95P300X300X100-7T170X240N]  95,57 270 top
IC7  SI5351C  [QFN50P400X400X90-21T270N]  96,44 180 top
IC8  AP2114H  [SOT230P700X180-4]  86.3,57.6 180 top
IC9  NCP702-3.3  [SOT95P240X110-5]  78.1,59.9 180 top
IC10  MAX2871  [QFN50P500X500X80-33T310]  68.05,52.25 270 top
IC11  RFSW6042  [QFN40P180X180X55-13T76N]  51.2,48.8 90 top
IC12  RFSW6042  [QFN40P180X180X55-13T76N]  51.2,39.2 270 top
IC13  QPC6324  [QFN50P400X400X75-21T206]  60.8,37.3 0 top
IC14  RFSA3714  [QFN50P400X400X75-25T270]  61.6,29.5 270 top
IC15  TRF37A73  [SON50P200X200X80-9T90X160N]  60.65,22.6 270 top
IC16  QPC6324  [QFN50P400X400X75-21T206]  61,9 180 top
IC17  QPC6324  [QFN50P400X400X75-21T206]  89,10 45 top
IC18  QPC6324  [QFN50P400X400X75-21T206]  30,10 45 top
IC19  AP2114H  [SOT230P700X180-4]  76,26 0 top
IC20  NCP702-3.3  [SOT95P240X110-5]  79.1,19.8 0 top
IC21  MAX2871  [QFN50P500X500X80-33T310]  88,26.4 90 top
IC22  LT5560  [SON50P300X300X80-9T165X238]  12.5,39.5 90 top
IC23  THS4521IDGKR  [SOP65P490X110-8N]  12.7,45.9 180 top
IC24  ADL5801  [QFN50P400X400X100-25T250N]  12.5,22.6 0 top
IC25  NCP702-1.8  [SOT95P240X110-5]  6,52.5 90 top
IC26  MCP33131D-10-E/MS  [SOP50P490X110-10N]  12.4,55.5 90 top
IC27  LT5560  [SON50P300X300X80-9T165X238]  113.6,43.5 90 top
IC28  THS4521IDGKR  [SOP65P490X110-8N]  113,50.2 180 top
IC29  ADL5801  [QFN50P400X400X100-25T250N]  105,28 270 top
IC30  NCP702-1.8  [SOT95P240X110-5]  107.5,61.1 0 top
IC31  MCP33131D-10-E/MS  [SOP50P490X110-10N]  112.7,61.1 90 top
IC32  THS4521IDGKR  [SOP65P490X110-8N]  33.2,33.1 180 top
IC33  ADL5801  [QFN50P400X400X100-25T250N]  41.3,18 0 top
IC34  NCP702-1.8  [SOT95P240X110-5]  37,44 90 top
IC35  MCP33131D-10-E/MS  [SOP50P490X110-10N]  33,44.3 90 top
IC36  LT5560  [SON50P300X300X80-9T165X238]  35.7,27.4 180 top
IC37  STM32G431CB  [QFN50P700X700X60-49T560N]  65.1,79.8 90 top
J1  PJ-014D  [PJ-014D]  56,98 180 top
J2  BU-1420701851  [BU-1420701851]  12,0.1 90 top
J3  BU-1420701851  [BU-1420701851]  110,0.1 90 top
J4  TYPE-C16P(073)  [TYPE-C16P]  64,90.1 180 top
JP1  DNP  [1X10/90]  32.7,95.6 0 top
JP2  DNP  [2X10]  6.7,78.4 90 top
L1  2u2  [SRN5040]  101.5,83.9 0 top
L2  2u2  [SRN5040]  90.3,85 90 top
L3  2u2  [SRN5040]  90.3,77 270 top
L4  2u2  [SRN5040]  79.3,74 90 top
L5  2u2  [SRN5040]  112.45,77.65 90 top
L6  Ferrite  [R0402]  22,40.4 270 top
L7  Ferrite  [R0402]  101,61.3 90 top
L8  Ferrite  [R0402]  30.9,19.8 270 top
L9  Ferrite  [R0402]  92,60 180 top
L10  Ferrite  [R0402]  92.2,46 270 top
L11  10u  [INDC2012X100N]  64.3,20.4 180 top
L12  Ferrite  [R0402]  16.8,40.7 270 top
L13  Ferrite  [R0402]  5.4,48.2 270 top
L14  330n  [L0402]  87.2,38 180 top
L15  Ferrite  [R0402]  16.8,43.4 270 top
L16  Ferrite  [R0402]  17.5,27.6 90 top
L17  Ferrite  [R0402]  7.7,28.8 90 top
L18  330n  [L0402]  83.2,38 180 top
L19  Ferrite  [R0402]  79.9,55 180 top
L20  Ferrite  [R0402]  73.3,59.2 180 top
L21  Ferrite  [R0402]  63,41 180 top
L22  Ferrite  [R0402]  65.2,34 270 top
L23  Ferrite  [R0402]  66.1,22.4 180 top
L24  330n  [L0402]  61.6,20.4 180 top
L25  Ferrite  [R0402]  64.3,6.5 90 top
L26  Ferrite  [R0402]  84,11.6 270 top
L27  Ferrite  [R0402]  24.8,12.5 270 top
L28  Ferrite  [R0402]  80,31 0 top
L29  Ferrite  [R0402]  83.5,20.5 0 top
L30  330n  [L0402]  11.8,36.3 180 top
L31  330n  [L0402]  14.2,36.3 0 top
L32  330n  [L0402]  14.4,25.8 180 top
L33  330n  [L0402]  11.6,25.8 0 top
L34  68n  [L0402]  14.7,29.9 90 top
L35  68n  [L0402]  11.3,29.9 90 top
L36  33n  [L0402]  14.7,32.2 90 top
L37  33n  [L0402]  11.3,32.2 90 top
L38  330n  [L0402]  112.8,40.2 180 top
L39  330n  [L0402]  115.4,40.2 0 top
L40  330n  [L0402]  108.2,26.25 90 top
L41  330n  [L0402]  108.2,28.7 270 top
L42  68n  [L0402]  114.7,28.8 90 top
L43  68n  [L0402]  113.5,28.8 90 top
L44  33n  [L0402]  114.7,32.4 90 top
L45  33n  [L0402]  113.5,32.4 90 top
L46  330n  [L0402]  43.2,21.2 180 top
L47  330n  [L0402]  40.5,21.2 0 top
L48  68n  [L0402]  43.5,25.3 90 top
L49  68n  [L0402]  40,25.3 90 top
L50  33n  [L0402]  43.5,27.6 90 top
L51  33n  [L0402]  40,27.6 90 top
L52  330n  [L0402]  44.79,27.63 270 top
L53  330n  [L0402]  38.7,27.6 270 top
L54  Ferrite  [R0402]  113.2,24.2 0 top
L55  Ferrite  [R0402]  109.4,31.9 90 top
L56  Ferrite  [R0402]  116.3,53 90 top
L57  Ferrite  [R0402]  117.5,46.8 0 top
L58  Ferrite  [R0402]  105.2,63.1 180 top
L59  Ferrite  [R0402]  45.4,14.2 0 top
L60  Ferrite  [R0402]  38.8,23 90 top
L61  Ferrite  [R0402]  38,31.1 0 top
L62  Ferrite  [R0402]  37,36.1 0 top
L63  Ferrite  [R0402]  37,40.4 180 top
L64  Ferrite  [R0402]  73.4,55.8 0 top
L65  Ferrite  [R0402]  83.8,30 90 top
LED1  Red  [CHIPLED_0603]  34.6,84.7 180 top
LED2  Green  [CHIPLED_0603]  37.6,84.8 180 top
LED3  Red  [CHIPLED_0603]  31.6,84.8 180 top
LED4  Red  [CHIPLED_0603]  28.6,84.8 180 top
LED5  Red  [CHIPLED_0603]  25.6,84.8 180 top
LED6  Green  [CHIPLED_0603]  22.6,84.8 180 top
LED7  Green  [CHIPLED_0603]  19.6,84.8 180 top
LED8  Green  [CHIPLED_0603]  16.6,84.8 180 top
LED9  Green  [CHIPLED_0603]  13.6,84.8 180 top
LED10  Green  [CHIPLED_0603]  10.6,84.8 180 top
LP1  LP0603A0947ANTR  [FILTRDFN160X84X70-4N]  47.7,43.9 90 top
LP2  LP0603N3500ANTR  [FILTRDFN160X84X70-4N]  55.6,44.1 90 top
LP3  LP0603A1880ANTR  [FILTRDFN160X84X70-4N]  58,44.1 90 top
Q1  SSM3J338R  [SOTFL95P240X80-3N]  70,88 180 top
Q2  SSM3J338R  [SOTFL95P240X80-3N]  73.3,89.9 0 top
R1  620  [R0402]  95.7,79.6 90 top
R2  4k7  [R0402]  99.5,72.2 0 top
R3  10k  [R0402]  96.4,72.2 0 top
R4  38k3  [R0402]  99.5,73.5 0 top
R5  10k  [R0402]  96.4,73.5 0 top
R6  10k  [R0402]  97.4,47.2 180 top
R7  100  [R0402]  80,38.7 90 top
R8  62  [R0402]  78,38 180 top
R9  100  [R0402]  76,38.7 270 top
R10  5k1  [R0402]  68.7,47.5 90 top
R11  10k  [R0402]  58.5,61.1 180 top
R12  49R9  [R0402]  63.1,53.4 90 top
R13  49R9  [R0402]  64.3,51.1 270 top
R14  49R9  [R0402]  63.1,48.8 90 top
R15  1k8  [R0402]  64.9,56.9 180 top
R16  82  [R0402]  69,57.6 270 top
R17  330  [R0402]  67.8,57.6 90 top
R18  10k  [R0402]  53,46 90 top
R19  10k  [R0402]  49.4,46 90 top
R20  10k  [R0402]  50.6,46 270 top
R21  10k  [R0402]  51.8,46 270 top
R22  10k  [R0402]  51.8,42 90 top
R23  10k  [R0402]  53,42 270 top
R24  10k  [R0402]  50.6,42 90 top
R25  10k  [R0402]  49.4,42 270 top
R26  2R7  [R0402]  61,16.4 270 top
R27  402  [R0402]  60.3,14.7 0 top
R28  56  [R0402]  59.7,13 90 top
R29  2R7  [R0402]  61,13 270 top
R30  5k1  [R0402]  87.3,31 270 top
R31  10k  [R0402]  86.06,20.81 90 top
R32  49R9  [R0402]  93.3,25.1 0 top
R33  49R9  [R0402]  93.3,26.3 0 top
R34  49R9  [R0402]  93.3,27.5 0 top
R35  49R9  [R0402]  93.3,28.7 0 top
R36  1k8  [R0402]  91.4,21.5 0 top
R37  82  [R0402]  87.3,20.8 90 top
R38  49R9  [R0402]  94,30.5 90 top
R39  330  [R0402]  88.5,20.8 270 top
R40  PAT0816-C-3DB-T5  [PAT0816]  96.5,7.95 180 top
R45  49R9  [R0402]  17.4,14 300 top
R46  49R9  [R0402]  19.5,14 240 top
R47  DNP  [PAT0816]  109.65,12 270 top
R48  DNP  [PAT0816]  11.65,12 270 top
R49  PAT0816-C-3DB-T5  [PAT0816]  23.25,7.95 180 top
R50  49R9  [R0402]  22.1,16 0 top
R53  220  [R0402]  11.7,42.5 0 top
R54  220  [R0402]  14,42.5 180 top
R55  6k8  [R0402]  9,45.9 90 top
R56  6k8  [R0402]  16.4,45.9 270 top
R57  DNP  [R0402]  13,19 0 top
R58  220  [R0402]  10,48.7 270 top
R59  220  [R0402]  15.2,48.7 270 top
R60  1k  [R0402]  8.2,19.5 180 top
R61  220  [R0402]  10.9,51.1 270 top
R62  220  [R0402]  14.4,51.2 270 top
R63  56  [R0402]  13,33.8 0 top
R64  20  [R0402]  14.7,34.5 270 top
R65  20  [R0402]  11.3,34.5 270 top
R66  56  [R0402]  13,35.1 180 top
R72  49R9  [R0402]  105.4,15.3 240 top
R73  49R9  [R0402]  103.4,15.3 300 top
R76  49R9  [R0402]  100.9,17.2 180 top
R80  220  [R0402]  112.8,46.8 0 top
R81  220  [R0402]  115.2,46.8 180 top
R82  6k8  [R0402]  108.2,50.2 90 top
R83  6k8  [R0402]  116.7,50.2 270 top
R84  DNP  [R0402]  100.6,27.5 270 top
R85  220  [R0402]  111,54 270 top
R86  220  [R0402]  115,54 270 top
R87  1k  [R0402]  101.8,31.9 90 top
R88  220  [R0402]  111,56.4 270 top
R89  220  [R0402]  115,56.4 270 top
R90  56  [R0402]  114.1,35.4 0 top
R91  20  [R0402]  114.7,37.2 270 top
R92  20  [R0402]  113.5,37.2 270 top
R93  56  [R0402]  114.1,39 180 top
R94  4k7  [R0402]  29.5,33.1 90 top
R95  4k7  [R0402]  36.9,33 270 top
R96  220  [R0402]  31.3,36.9 270 top
R97  220  [R0402]  35.1,37 270 top
R98  220  [R0402]  31.3,39.4 270 top
R99  220  [R0402]  35.1,39.4 270 top
R100  DNP  [R0402]  42.1,14.3 0 top
R101  1k  [R0402]  37.4,14.8 180 top
R102  220  [R0402]  32.6,26.8 90 top
R103  220  [R0402]  34.6,29.7 180 top
R104  0  [R0402]  56.9,75.7 180 top
R105  0  [R0402]  56.9,73.3 180 top
R106  0  [R0402]  56.9,74.5 180 top
R107  0  [R0402]  56.9,72.1 180 top
R108  0  [R0402]  56.9,70.9 180 top
R109  0  [R0402]  56.9,76.9 180 top
R110  0  [R0402]  56.9,78.1 180 top
R111  DNP  [R0402]  53.9,75.7 180 top
R112  DNP  [R0402]  53.9,73.3 180 top
R113  DNP  [R0402]  53.9,74.5 180 top
R114  DNP  [R0402]  53.9,72.1 180 top
R115  DNP  [R0402]  53.9,70.9 180 top
R116  10k  [R0402]  67.3,86.3 90 top
R117  10k  [R0402]  66,86.3 90 top
R118  20  [R0402]  64,86.3 270 top
R119  20  [R0402]  62.7,86.3 90 top
R120  330  [R0402]  36.1,84.8 90 top
R121  10k  [R0402]  49.1,71.2 0 top
R122  10k  [R0402]  49.1,70 180 top
R123  20  [R0402]  115.1,62.6 270 top
R124  20  [R0402]  49.2,62.2 180 top
R125  10k  [R0402]  70.9,91.5 270 top
R126  20  [R0402]  93,40.5 270 top
R127  10k  [R0402]  48.5,59.6 0 top
R128  10k  [R0402]  48.5,60.9 0 top
R129  10k  [R0402]  46,80 90 top
R130  10k  [R0402]  20,63.3 90 top
R131  10k  [R0402]  22.3,63.3 270 top
R132  10k  [R0402]  26.3,55.2 0 top
R133  10k  [R0402]  26.3,56.4 180 top
R134  330  [R0402]  39.1,84.8 270 top
R135  330  [R0402]  33.1,84.8 270 top
R136  330  [R0402]  30.1,84.8 270 top
R137  330  [R0402]  27.1,84.8 270 top
R138  330  [R0402]  24.1,84.8 270 top
R139  330  [R0402]  21.1,84.8 270 top
R140  330  [R0402]  18.1,84.8 270 top
R141  330  [R0402]  15.1,84.8 270 top
R142  330  [R0402]  12.1,84.8 270 top
R143  10k  [R0402]  28.4,43.2 90 top
R144  10k  [R0402]  29.5,37 270 top
R145  10k  [R0402]  16.6,55 90 top
R146  10k  [R0402]  19.2,51.7 270 top
R147  10k  [R0402]  109.3,54.1 270 top
R148  10k  [R0402]  105.1,55.1 90 top
R149  10k  [R0402]  85.4,12.8 90 top
R150  10k  [R0402]  49.3,23 90 top
R151  10k  [R0402]  50.5,23 90 top
R152  10k  [R0402]  18.9,33.3 90 top
R153  10k  [R0402]  54,23.1 90 top
R154  10k  [R0402]  67.3,40.5 90 top
R155  10k  [R0402]  72.4,40.5 90 top
R156  10k  [R0402]  48.5,31.2 180 top
R157  10k  [R0402]  50.9,30.4 180 top
R158  10k  [R0402]  48.5,29.6 180 top
R159  10k  [R0402]  50.9,28.8 180 top
R160  10k  [R0402]  48.5,26.4 0 top
R161  10k  [R0402]  50.9,27.2 0 top
R162  10k  [R0402]  48.5,28 0 top
R163  10k  [R0402]  57.3,59.6 180 top
R164  100  [R0402]  51.6,61.1 180 top
R165  10k  [R0402]  55.8,62.3 180 top
R166  10k  [R0402]  49,57.9 180 top
R167  100  [R0402]  52.8,57.9 180 top
R168  75  [R0402]  5.1,21.2 270 top
R169  100  [R0402]  4.4,23.1 180 top
R170  100  [R0402]  55.4,61.1 180 top
R171  100  [R0402]  56,57.9 180 top
R172  100  [R0402]  4.4,19.3 180 top
R173  75  [R0402]  34.7,19.8 180 top
R174  100  [R0402]  35.4,21.6 90 top
R175  100  [R0402]  32.9,21 90 top
R176  0  [R0402]  87.2,46 180 top
R177  0  [R0402]  83.2,46 180 top
R178  0  [R0402]  83.2,41.6 180 top
R179  0  [R0402]  87.2,41.6 180 top
R180  0  [R0402]  98.7,39.4 270 top
R181  0  [R0402]  101.1,39.4 90 top
T1  B012-617DB-1-63-B331  [EASTEVER_BALUN]  18.5,17.7 270 top
T2  B012-617DB-1-63-B331  [EASTEVER_BALUN]  104.4,19 270 top
T3  B012-617DB-1-63-B331  [EASTEVER_BALUN]  50,17.4 0 top
TP1  TPB1,27  [B1,27]  28,66 180 bottom
TP2  TPB1,27  [B1,27]  28,64 180 bottom
TP3  TPB1,27  [B1,27]  28,62 180 bottom
TP4  TPB1,27  [B1,27]  28,68 180 bottom
TP5  TPB1,27  [B1,27]  20,37 180 bottom
TP6  TPB1,27  [B1,27]  22,37 180 bottom
TP7  TPB1,27  [B1,27]  106,58 180 bottom
TP8  TPB1,27  [B1,27]  107,55 180 bottom
TP9  TPB1,27  [B1,27]  36,44 180 bottom
TP10  TPB1,27  [B1,27]  32,44 180 bottom
TP11  TPB1,27  [B1,27]  86.3,60.3 180 bottom
TP12  TPB1,27  [B1,27]  90,54 180 bottom
TP13  TPB1,27  [B1,27]  73,57 0 bottom
TP14  TPB1,27  [B1,27]  76,54 0 bottom
TP15  TPB1,27  [B1,27]  84,19.7 0 bottom
TP16  TPB1,27  [B1,27]  79.9,31 180 bottom
TP17  TPB1,27  [B1,27]  5,54.5 0 bottom
TP18  TPB1,27  [B1,27]  112,60.7 0 bottom
TP19  TPB1,27  [B1,27]  34,44 0 bottom
U1  W25Q16BVSN  [SO08]  55.4,67.2 90 top
U2  6SLX9TQG144  [TQ144]  35,69 90 top
X1  SMA_CONNECTOR  [J502-ND-142-0711-821/826]  111,97.9 270 top
X2  SMA_CONNECTOR  [J502-ND-142-0711-821/826]  95,97.9 270 top
Y1  DSB221SDN/26MHz  [2.5X2.0_KXO-86-TCXO]  102.1,43 90 top

## Library data of the parts
C1-C274 D1 IC1-IC37 J1-J4 JP1 JP2 L1-L65 LED1-LED10 LP1-LP3 Q1 Q2 R1-R40 R45-R50 R53-R66 R72 R73 R76 R80-R181 T1-T3 TP1-TP19 U1 U2 X1 X2 = VNA
Y1 = crystal-geyer_V1_0

## Nets
+3V3: C14.1 C15.1 C29.2 C31.2 C132.2 C169.2 C201.2 C206.1 C207.1 C208.1 C209.1 C210.1 C212.1 C214.1 C216.1 C218.1 C220.1 C221.1 C222.1 IC7.20 IC26.9 IC26.10 IC31.9 IC31.10 IC35.9 IC35.10 IC37.1 IC37.20 IC37.21 IC37.23 IC37.35 IC37.48 JP1.5 JP2.1 L4.P$2 L10.1 L21.1 L22.1 L23.1 L25.2 L26.1 L27.1 L64.2 L65.2 LED1.A LED2.A LED3.A LED4.A LED5.A LED6.A LED7.A LED8.A LED9.A LED10.A R108.1 R116.2 R117.2 R121.2 R127.2 R128.2 R129.2 R130.2 R132.2 TP2.TP U1.3 U1.7 U1.8 U2.P4 U2.P18 U2.P20 U2.P31 U2.P36 U2.P42 U2.P53 U2.P63 U2.P69 U2.P76 U2.P86 U2.P90 U2.P103 U2.P122 U2.P125 U2.P129 U2.P135 Y1.4
+5V: C1.1 C2.1 C3.1 C6.2 IC1.10 IC2.1 IC2.4 IC2.8 IC2.14 IC2.15 J1.1 L1.P$1 Q2.3
+5V/1: C26.2 L6.2 L12.2 L13.2 L15.2 L16.2 L17.2 R60.1 TP5.TP
+5V/2: C27.2 L7.2 L54.2 L55.2 L56.2 L57.2 L58.2 R87.1 TP7.TP
+5V/3: C28.2 L8.2 L59.2 L60.2 L61.2 L62.2 L63.1 R101.1 TP9.TP
+5V/4: C49.1 C50.1 C78.1 C79.1 IC8.3 IC9.1 IC9.3 IC19.3 IC20.1 IC20.3 L9.2 TP11.TP
+6V: C16.1 C17.1 C18.2 C19.2 C20.2 C21.2 IC3.4 IC3.6 IC4.4 IC4.6 IC5.4 IC5.6 IC6.4 IC6.6 L5.P$2 TP3.TP
AMP_PWDN: C243.1 R153.2 U2.P8
ATT_D0: C249.1 R156.2 U2.P16
ATT_D1: C251.1 R157.2 U2.P15
ATT_D2: C253.1 R158.2 U2.P14
ATT_D3: C255.1 R159.2 U2.P12
ATT_D4: C262.1 R162.1 U2.P11
ATT_D5: C260.1 R161.1 U2.P10
ATT_D6: C258.1 R160.1 U2.P9
EN_6V: IC1.11 IC37.25
FILT_IN_C1: C263.1 R21.2 U2.P26
FILT_IN_C2: C264.1 R20.2 U2.P24
FILT_OUT_C1: C266.1 R24.2 U2.P22
FILT_OUT_C2: C265.1 R22.2 U2.P23
FPGA_CCLK: R109.2 R111.2 U2.P70
FPGA_CLK: IC7.15 R126.1
FPGA_CSO_B: R114.2 U2.P38
FPGA_DIN: R110.2 R113.2 U2.P65
FPGA_DONE: IC37.47 R129.1 U2.P71
FPGA_INIT_B: IC37.6 R128.1 U2.P39
FPGA_M1: R108.2 R115.1 U2.P60
FPGA_MOSI: R112.2 U2.P64
FPGA_PROGRAM_B: IC37.19 R127.1 U2.P37
FPGA_RESET: IC37.45 U2.P72
GND: C1.2 C2.2 C3.2 C4.1 C5.1 C6.1 C7.2 C8.2 C10.2 C11.2 C12.2 C13.2 C14.2 C15.2 C16.2 C17.2 C18.1 C19.1 C20.1 C21.1 C22.1 C23.1 C24.1 C25.1 C26.1 C27.1 C28.1 C29.1 C31.1 C32.1 C33.1 C35.2 C36.2 C37.2 C38.2 C40.2 C41.2 C42.2 C43.2 C44.2 C45.2 C46.2 C47.2 C49.2 C50.2 C52.2 C53.2 C54.2 C55.2 C56.2 C57.2 C58.2 C59.2 C60.2 C61.2 C63.2 C64.2 C67.1 C69.2 C70.2 C72.2 C73.2 C75.2 C76.2 C77.2 C78.2 C79.2 C81.2 C82.2 C83.2 C84.2 C85.2 C86.2 C87.2 C88.2 C89.2 C90.2 C91.2 C94.2 C95.1 C97.1 C102.1 C103.1 C104.2 C105.2 C106.2 C108.2 C111.2 C115.1 C116.2 C117.2 C118.1 C119.2 C122.2 C125.1 C127.2 C129.2 C131.2 C132.1 C134.1 C139.1 C140.1 C141.2 C142.2 C143.2 C145.2 C148.2 C152.1 C153.2 C154.2 C155.1 C156.2 C159.2 C162.1 C164.2 C166.2 C168.2 C169.1 C171.2 C172.2 C175.2 C177.2 C180.2 C181.1 C182.2 C185.2 C186.1 C187.1 C189.2 C190.2 C193.2 C195.2 C198.2 C199.1 C201.1 C204.1 C205.1 C206.2 C207.2 C208.2 C209.2 C210.2 C211.2 C212.2 C213.2 C214.2 C215.2 C216.2 C217.2 C218.2 C219.2 C220.2 C221.2 C222.2 C223.2 C224.2 C225.2 C226.2 C227.2 C228.2 C229.2 C230.2 C231.2 C232.2 C233.2 C234.2 C235.2 C236.2 C237.2 C238.2 C239.2 C240.2 C241.2 C242.2 C243.2 C244.2 C245.2 C246.2 C247.2 C248.2 C249.2 C250.2 C251.2 C252.2 C253.2 C254.2 C255.2 C256.2 C257.2 C258.2 C259.2 C260.2 C261.2 C262.2 C263.2 C264.2 C265.2 C266.2 C267.2 C268.2 C271.2 C272.2 C273.2 C274.2 IC1.4 IC1.5 IC1.6 IC1.13 IC2.3 IC2.5 IC2.6 IC2.17 IC3.1 IC3.7 IC4.1 IC4.7 IC5.1 IC5.7 IC6.1 IC6.7 IC7.21 IC8.1 IC9.2 IC10.8 IC10.9 IC10.11 IC10.18 IC10.21 IC10.27 IC10.31 IC10.33 IC11.5 IC11.8 IC11.10 IC11.12 IC11.13 IC12.5 IC12.8 IC12.10 IC12.12 IC12.13 IC13.1 IC13.2 IC13.4 IC13.5 IC13.6 IC13.7 IC13.9 IC13.10 IC13.11 IC13.12 IC13.14 IC13.15 IC13.18 IC13.19 IC13.21 IC14.3 IC14.4 IC14.6 IC14.7 IC14.8 IC14.9 IC14.10 IC14.11 IC14.12 IC14.13 IC14.15 IC14.25 IC15.3 IC15.4 IC15.6 IC15.8 IC15.9 IC16.1 IC16.2 IC16.4 IC16.5 IC16.6 IC16.7 IC16.9 IC16.10 IC16.11 IC16.12 IC16.14 IC16.15 IC16.18 IC16.19 IC16.21 IC17.1 IC17.2 IC17.4 IC17.5 IC17.6 IC17.7 IC17.9 IC17.10 IC17.11 IC17.12 IC17.14 IC17.15 IC17.16 IC17.18 IC17.19 IC17.21 IC18.1 IC18.2 IC18.4 IC18.5 IC18.6 IC18.7 IC18.9 IC18.10 IC18.11 IC18.12 IC18.14 IC18.15 IC18.16 IC18.18 IC18.19 IC18.21 IC19.1 IC20.2 IC21.8 IC21.9 IC21.11 IC21.18 IC21.21 IC21.27 IC21.31 IC21.33 IC22.9 IC23.6 IC24.1 IC24.2 IC24.5 IC24.6 IC24.8 IC24.12 IC24.14 IC24.17 IC24.19 IC24.23 IC24.25 IC25.2 IC26.5 IC27.9 IC28.6 IC29.1 IC29.2 IC29.5 IC29.6 IC29.8 IC29.12 IC29.14 IC29.17 IC29.19 IC29.23 IC29.25 IC30.2 IC31.5 IC32.6 IC33.1 IC33.2 IC33.5 IC33.6 IC33.8 IC33.12 IC33.14 IC33.17 IC33.19 IC33.23 IC33.25 IC34.2 IC35.5 IC36.9 IC37.46 IC37.49 J1.2 J2.G@1 J2.G@2 J2.G@3 J2.G@4 J3.G@1 J3.G@2 J3.G@3 J3.G@4 J4.1 J4.12 J4.M1 J4.M2 J4.M3 J4.M4 JP1.7 JP2.20 L30.2 L31.2 L38.2 L39.2 L52.2 L53.2 LP1.2 LP1.3 LP2.2 LP2.3 LP3.2 LP3.3 R3.1 R5.1 R6.1 R7.2 R9.1 R10.1 R11.1 R14.1 R17.2 R18.2 R19.2 R23.2 R25.2 R28.1 R30.1 R31.1 R38.1 R39.2 R40.3 R47.3 R48.3 R49.3 R50.2 R76.2 R115.2 R122.1 R131.1 R133.1 R134.2 R169.2 R172.2 R174.2 R175.2 T3.4 TP4.TP TP6.TP TP8.TP TP10.TP TP12.TP U1.4 U2.P3 U2.P13 U2.P25 U2.P49 U2.P54 U2.P68 U2.P73 U2.P77 U2.P91 U2.P96 U2.P108 U2.P113 U2.P130 U2.P136 X1.G@1 X1.G@2 X1.G@3 X1.G@4 X2.G@1 X2.G@2 X2.G@3 X2.G@4 Y1.1 Y1.2
HIGHBAND_SELECT: C245.1 R154.2 U2.P21
LO1_CE: IC21.4 R31.2 U2.P45
LO1_CLK: IC21.1 U2.P48
LO1_LD: IC21.25 U2.P56
LO1_LE: IC21.3 U2.P46
LO1_MOSI: IC21.2 U2.P47
LO1_MUX: IC21.30 U2.P51
LO1_REF: C80.1 IC7.17
LO1_RF_EN: IC21.26 U2.P55
LOWBAND_SELECT: C247.1 R155.2 U2.P17
MCU_AUX1: IC37.9 U2.P78
MCU_AUX2: IC37.10 U2.P74
MCU_AUX3: IC37.11 U2.P75
MCU_FLASH_CS: IC37.17 R107.1
MCU_FPGA_CCLK: IC37.26 R109.1
MCU_FPGA_DIN: IC37.28 R110.1
MCU_FPGA_NSS: IC37.12 U2.P67
MCU_FPGA_UNUSED1: IC37.43 U2.P79
MCU_FPGA_UNUSED2: IC37.41 U2.P80
MCU_FPGA_UNUSED3: IC37.40 U2.P81
MCU_INTR: IC37.18 U2.P59
MCU_MISO: IC37.14 R106.1 U2.P62
MCU_MOSI: IC37.15 R105.1 U2.P61
MCU_SCK: IC37.13 R104.1 U2.P66
N$1: C96.2 R49.1
N$2: R45.2 R46.2 R49.2
N$3: C120.2 C124.1 L34.1
N$4: C136.2 R47.1 R47.2 R72.1 T2.4
N$5: R46.1 R50.1 T1.4
N$6: C99.1 J2.1
N$7: C109.2 IC24.15
N$8: C110.2 IC24.16
N$9: C107.1 C110.1 T1.3
N$10: C107.2 C109.1 T1.2
N$11: C117.1 IC24.4
N$12: C114.2 IC24.3
N$13: C125.2 C126.1 IC26.3 R61.1
N$14: C120.1 IC24.20 L32.2
N$15: C123.1 IC24.21 L33.2
N$16: C123.2 C124.2 L35.1
N$17: C128.2 L35.2 L37.1
N$18: C98.2 IC22.8
N$19: C118.2 IC24.10 R57.1 R60.2
N$20: C126.2 C127.1 IC26.4 R62.1
N$21: C133.2 R40.2
N$22: R40.1 R72.2 R73.2
N$23: IC27.3 L38.1 R92.1 R93.2
N$24: C97.2 IC22.1
N$25: C102.2 C103.2 IC22.7 L12.1 R53.1 R54.1
N$26: R73.1 R76.1 T2.6
N$27: C100.1 IC22.6 R53.2
N$28: C101.1 IC22.5 R54.2
N$29: C146.2 IC29.15
N$30: C147.2 IC29.16
N$31: C113.1 IC23.4 R56.1 R59.2
N$32: C112.2 IC23.5 R55.2 R58.2
N$33: C128.1 L34.2 L36.1
N$34: D1.A IC1.7 IC1.8 L1.P$2
N$35: C144.1 C147.1 T2.3
N$36: C144.2 C146.1 T2.2
N$37: C154.1 IC29.4
N$38: C151.2 IC29.3
N$39: C157.1 IC29.20 L40.2
N$40: C160.1 IC29.21 L41.2
N$41: C155.2 IC29.10 R84.1 R87.2
N$42: C134.2 IC27.1
N$43: C137.1 IC27.6 R80.2
N$44: C138.1 IC27.5 R81.2
N$45: C150.1 IC28.4 R83.1 R86.2
N$46: C149.2 IC28.5 R82.2 R85.2
N$47: C157.2 C161.1 L42.1
N$48: C160.2 C161.2 L43.1
N$49: C165.2 L43.2 L45.1
N$50: C165.1 L42.2 L44.1
N$51: C77.1 IC17.20 L26.2
N$52: C135.2 IC27.8
N$53: C162.2 C163.1 IC31.3 R88.1
N$54: C163.2 C164.1 IC31.4 R89.1
N$55: C167.1 L44.2 R90.2 R91.2
N$56: C167.2 L45.2 R90.1 R92.2
N$57: C43.1 L14.2 L18.1
N$58: C138.2 C150.2 IC28.1 R83.2
N$59: C137.2 C149.1 IC28.8 R82.1
N$60: C39.2 X2.1
N$61: C170.2 T3.6
N$62: C130.1 L36.2 R63.2 R64.2
N$63: C130.2 L37.2 R63.1 R65.2
N$64: C67.2 IC10.20 R15.2
N$65: IC1.12 R1.2
N$66: C178.2 IC33.15
N$67: C179.2 IC33.16
N$68: C176.1 C179.1 T3.3
N$69: C176.2 C178.1 T3.2
N$70: C185.1 IC33.4
N$71: C183.2 IC33.3
N$72: C191.1 IC33.20 L46.2
N$73: C192.1 IC33.21 L47.2
N$74: C186.2 IC33.10 R100.1 R101.2
N$75: C199.2 IC36.1
N$76: C202.1 IC36.6 R102.2
N$77: C203.1 IC36.5 R103.2
N$78: C173.1 C202.2 IC32.8 R94.1
N$79: C174.2 C203.2 IC32.1 R95.2
N$80: C174.1 IC32.4 R95.1 R97.2
N$81: C173.2 IC32.5 R94.2 R96.2
N$82: C191.2 C194.1 L48.1
N$83: C192.2 C194.2 L49.1
N$84: C196.2 L49.2 L51.1
N$85: C196.1 L48.2 L50.1
N$86: C197.1 IC36.4 L50.2 L52.1
N$87: C197.2 IC36.3 L51.2 L53.1
N$88: C200.2 IC36.8
N$89: C187.2 C188.1 IC35.3 R98.1
N$90: C188.2 C189.1 IC35.4 R99.1
N$91: C40.1 R180.2 R181.1
N$92: C101.2 C113.2 IC23.1 R56.2
N$93: C63.1 C66.1 IC10.7 R15.1
N$94: C58.1 IC10.24
N$95: C100.2 C112.1 IC23.8 R55.1
N$96: C41.1 R178.1 R179.2
N$97: C36.1 IC7.12 R179.1
N$98: C59.1 IC10.19
N$99: C42.1 R176.2 R177.1
N$100: C22.2 IC3.2 IC3.3 L6.1
N$101: C35.1 IC7.19 R180.1
N$102: C60.1 IC10.23
N$103: C39.1 IC7.16
N$104: C66.2 R16.1
N$105: IC10.5 R16.2 R17.1
N$106: IC10.22 R10.2
N$107: C30.1 X1.1
N$108: C30.2 IC7.6
N$109: C32.2 C33.2 IC7.10 IC7.11 IC7.14 IC7.18 L10.2
N$110: C56.1 C61.1 C64.1 IC10.16 IC10.17 L19.2 R12.2 R13.2 TP14.TP
N$111: C86.1 IC21.6 IC21.10 L29.2 TP15.TP
N$112: IC7.7 R6.2
N$113: C34.2 Y1.3
N$114: C34.1 IC7.1
N$115: C95.2 IC21.20 R36.2
N$116: C51.2 IC10.29
N$117: C65.1 IC10.12 R12.1
N$118: C62.2 IC10.13 R13.1
N$119: C62.1 R14.2
N$120: C65.2 IC11.7
N$121: IC11.9 IC12.6
N$122: IC11.11 LP1.4
N$123: IC12.4 LP1.1
N$124: IC12.11 LP2.1
N$125: IC12.9 LP3.1
N$126: IC11.6 LP3.4
N$127: IC11.4 LP2.4
N$128: C53.1 IC8.2 IC8.4 L19.1
N$129: C52.1 IC9.5 L20.1
N$130: C68.1 IC12.7
N$131: C90.1 C92.1 IC21.7 R36.1
N$132: C87.1 IC21.24
N$133: C88.1 IC21.19
N$134: C89.1 IC21.23
N$135: C92.2 R37.1
N$136: IC21.5 R37.2 R39.1
N$137: IC21.22 R30.2
N$138: C85.1 C91.1 C94.1 IC21.16 IC21.17 L28.2 R32.2 R33.2 R34.2 R35.2 TP16.TP
N$139: C80.2 IC21.29
N$140: C69.1 IC13.20 L21.2
N$141: C93.1 R38.2
N$142: C82.1 IC19.2 IC19.4 L28.1
N$143: C81.1 IC20.5 L29.1
N$144: IC13.8 IC14.5
N$145: C70.1 IC14.2 IC14.16 L22.2
N$146: C71.1 IC14.14
N$147: C93.2 IC21.15 R35.1
N$148: C71.2 IC15.2
N$149: C74.1 IC15.7 L24.2
N$150: C74.2 R26.1
N$151: IC16.8 R29.2
N$152: C72.1 C73.1 IC15.1 L11.1 L23.2
N$153: R26.2 R27.2 R29.1
N$154: IC16.13 IC18.8
N$155: IC16.3 IC17.3
N$156: C76.1 IC18.20 L27.2
N$157: C38.1 IC7.13 L14.1
N$158: C9.2 IC1.3 R4.1 R5.2
N$159: C48.2 R8.2 R9.2
N$160: C37.1 IC7.9 R176.1
N$161: C23.2 IC4.2 IC4.3 L7.1
N$162: IC1.9 R2.1 R3.2
N$164: C24.2 IC5.2 IC5.3 L8.1
N$165: C4.2 IC1.2
N$166: C25.2 IC6.2 IC6.3 L9.1
N$167: Q1.2 Q2.2 R125.2
N$168: J1.3 Q1.1 Q2.1 R125.1
N$169: C225.1 R132.1 R144.1 U2.P144
N$170: C227.1 R131.2 R145.2 U2.P140
N$171: IC2.7 L2.P$1
N$172: C232.1 R122.2 R147.1 U2.P57
N$173: C229.1 R130.1 R146.1 U2.P141
N$174: C236.1 IC17.17 R149.1
N$175: R135.2 U2.P92
N$176: C240.1 IC16.16 R151.1
N$177: C9.1 C12.1 C13.1 D1.C L5.P$1 R2.2 R4.2
N$178: C238.1 IC16.17 R150.1
N$179: R136.2 U2.P93
N$180: C268.1 IC10.4 R163.1
N$181: IC2.2 L3.P$1
N$182: C242.1 IC18.17 R152.1
N$183: C8.1 C11.1 IC2.16 L3.P$2 L4.P$1
N$184: C244.1 IC15.5 R153.1
N$185: C246.1 IC13.17 R154.1
N$186: J4.6 J4.8 R119.2
N$187: IC37.33 R118.2
N$188: IC37.34 R119.1
N$189: J4.5 J4.7 R118.1
N$190: LED1.C R120.1
N$191: IC37.38 R120.2
N$192: C250.1 IC14.1 R156.1
N$193: C248.1 IC13.16 R155.1
N$194: JP2.2 U2.P134
N$195: JP2.4 U2.P133
N$196: JP2.3 U2.P132
N$197: R104.2 R111.1 U1.6
N$198: R126.2 U2.P50
N$199: IC11.2 R18.1 R21.1
N$200: IC11.1 R19.1 R20.1
N$201: IC12.1 R22.1 R23.1
N$202: IC12.2 R24.1 R25.1
N$203: C131.1 IC25.5 IC26.2 TP17.TP
N$204: C168.1 IC30.5 IC31.2 TP18.TP
N$205: C198.1 IC34.5 IC35.2 TP19.TP
N$206: LED10.C R142.1
N$207: LED9.C R141.1
N$208: LED8.C R140.1
N$209: LED7.C R139.1
N$210: LED6.C R138.1
N$211: LED5.C R137.1
N$212: LED4.C R136.1
N$213: LED3.C R135.1
N$214: LED2.C R134.1
N$215: R142.2 U2.P82
N$216: R141.2 U2.P83
N$217: IC22.4 L31.1 R64.1 R66.1
N$218: IC22.3 L30.1 R65.1 R66.2
N$219: R140.2 U2.P84
N$220: R139.2 U2.P85
N$221: R138.2 U2.P87
N$222: R137.2 U2.P88
N$223: IC27.4 L39.1 R91.1 R93.1
N$224: R124.2 U2.P41
N$225: C5.2 R1.1
N$226: IC10.1 R164.1
N$227: C252.1 IC14.24 R157.1
N$228: R123.2 U2.P43
N$229: IC24.11 R57.2
N$230: IC29.11 R84.2
N$231: IC33.11 R100.2
N$232: IC10.2 R170.1
N$233: IC37.31 IC37.44 J4.4
N$234: IC37.32 IC37.42 J4.10
N$235: C75.1 IC16.20 L25.1
N$236: C129.1 IC25.1 IC25.3 IC26.1 L13.1
N$237: R105.2 R112.1 U1.5
N$238: C119.1 C122.1 L16.1 L32.1 L33.1
N$239: C136.1 J3.1
N$240: R106.2 R113.1 U1.2
N$241: R107.2 R114.1 U1.1
N$242: JP2.6 U2.P131
N$243: JP2.5 U2.P127
N$244: JP2.8 U2.P126
N$245: JP2.7 U2.P124
N$246: JP2.10 U2.P123
N$247: JP2.9 U2.P121
N$248: JP2.12 U2.P120
N$249: JP2.11 U2.P119
N$250: JP2.14 U2.P118
N$251: JP2.13 U2.P117
N$252: JP2.16 U2.P116
N$253: JP2.15 U2.P115
N$254: JP2.18 U2.P114
N$255: JP2.17 U2.P112
N$256: JP2.19 U2.P111
N$257: C254.1 IC14.23 R158.1
N$258: IC10.3 R171.1
N$259: C256.1 IC14.22 R159.1
N$260: C257.1 IC14.19 R160.2
N$261: IC10.30 R167.1
N$262: C259.1 IC14.20 R161.2
N$263: C272.1 IC10.26 R165.1
N$264: C261.1 IC14.21 R162.2
N$265: C269.2 R168.2 R172.1
N$266: C274.1 IC10.25 R166.1
N$267: C114.1 R168.1 R169.1
N$268: C270.2 R173.2 R175.1
N$269: C183.1 R173.1 R174.1
N$270: L11.2 L24.1
N$271: C99.2 R45.1 R48.1 R48.2 T1.6
N$272: C115.2 IC23.3 L15.1
N$273: C104.1 C105.1 C106.1 C108.1 C111.1 IC24.7 IC24.13 IC24.18 IC24.24 L17.1
N$274: C141.1 C142.1 C143.1 C145.1 C148.1 IC29.7 IC29.13 IC29.18 IC29.24 L54.1
N$275: C156.1 C159.1 L40.1 L41.1 L55.1
N$276: C152.2 IC28.3 L56.1
N$277: C139.2 C140.2 IC27.7 L57.1 R80.1 R81.1
N$278: C166.1 IC30.1 IC30.3 IC31.1 L58.1
N$279: C171.1 C172.1 C175.1 C177.1 C180.1 IC33.7 IC33.13 IC33.18 IC33.24 L59.1
N$280: C190.1 C193.1 L46.1 L47.1 L60.1
N$281: C204.2 C205.2 IC36.7 L61.1 R102.1 R103.1
N$282: C181.2 IC32.3 L62.1
N$283: C195.1 IC34.1 IC34.3 IC35.1 L63.2
N$312: C223.1 R133.2 R143.2 U2.P143
N$320: C54.1 C55.1 IC10.28 IC10.32 L64.1
N$322: C83.1 C84.1 IC21.28 IC21.32 L65.1
N$512: C234.1 R121.1 R148.2 U2.P58
NRST: IC37.7 JP1.9
OUT+: C121.1 R58.1 R61.2
OUT+1: C158.1 R85.1 R88.2
OUT+2: C184.1 R96.1 R98.2
OUT-: C121.2 R59.1 R62.2
OUT-1: C158.2 R86.1 R89.2
OUT-2: C184.2 R97.1 R99.2
OUT_CM: C116.1 IC23.2
OUT_CM1: C153.1 IC28.2
OUT_CM2: C182.1 IC32.2
PORT1_CONVSTART: IC26.6 U2.P139
PORT1_SCLK: IC26.8 U2.P137
PORT1_SDO: IC26.7 U2.P138
PORT1LO1: C269.1 IC21.12 R32.1
PORT1LO2: C46.1 C98.1 R177.2
PORT1MIX1_EN: C230.1 IC24.9 R146.2
PORT1MIX2_EN: C228.1 IC22.2 IC23.7 R145.1
PORT1SRC: C96.1 IC18.3
PORT1SWITCH: C241.1 R152.2 U2.P142
PORT2_CONVSTART: IC31.6 U2.P44
PORT2_SCLK: IC31.8 R124.1
PORT2_SDO: IC31.7 R123.1
PORT2LO1: C151.1 IC21.14 R34.1
PORT2LO2: C44.1 C135.1 R181.2
PORT2MIX1_EN: C233.1 IC29.9 R148.1
PORT2MIX2_EN: C231.1 IC27.2 IC28.7 R147.2
PORT2SRC: C133.1 IC17.8
PORT2SWITCH: C235.1 R149.2 U2.P40
PORTSWITCH1: C239.1 R151.2 U2.P6
PORTSWITCH2: C237.1 R150.2 U2.P7
REF_CONVSTART: IC35.6 U2.P5
REF_SCLK: IC35.8 U2.P1
REF_SDO: IC35.7 U2.P2
REFLO1: C270.1 IC21.13 R33.1
REFLO2: C45.1 C200.1 R178.2
REFLO3: C47.1 L18.2 R7.1 R8.1
REFMIX1_EN: C226.1 IC33.9 R144.2
REFMIX2_EN: C224.1 IC32.7 IC36.2 R143.1
REFSRC: C170.1 R27.1 R28.2
SCL: IC2.11 IC7.4 IC37.16 R116.1
SDA: IC2.10 IC7.5 IC37.30 R117.1
SOURCE_CE: C267.1 R11.2 R163.2 U2.P27
SOURCE_CLK: R164.2 U2.P32
SOURCE_HIGHBAND: C68.2 IC13.3
SOURCE_LD: C273.1 R166.2 U2.P35
SOURCE_LE: R171.2 U2.P29
SOURCE_LOWBAND: C48.1 IC13.13
SOURCE_MOSI: R170.2 U2.P30
SOURCE_MUX: R167.2 U2.P33
SOURCE_REF: C51.1 IC7.8
SOURCE_RF_EN: C271.1 R165.2 U2.P34
SOURCE_VCC: C57.1 IC10.6 IC10.10 IC11.3 IC12.3 L20.2 TP13.TP
SWCLK: IC37.37 JP1.6
SWDIO: IC37.36 JP1.8
TCK: JP1.1 U2.P109
TDI: JP1.3 U2.P110
TDO: JP1.2 U2.P106
TMS: JP1.4 U2.P107
UART_TX: IC37.39 JP1.10
USB_POWER: J4.2 J4.11 Q1.3
VCCINT: C7.1 C10.1 C211.1 C213.1 C215.1 C217.1 C219.1 IC2.9 L2.P$2 TP1.TP U2.P19 U2.P28 U2.P52 U2.P89 U2.P128

## Tracks (layer width: path | path; a pad name or v marks a point on that pad's centre or on a via)
+3V3  (via drill 0.25)
  Top 0.2: L27.1 24.8,14 | IC37.23 69.05,82.05 70,81.1 | 70,81.1 C207.1 69.91,81.05 IC37.21 | IC37.20 69.5,80.55 70,81.05 70,81.1 | IC37.1 61.66,76.36 | IC37.48 61.66,76.36 | R108.1 v58.4,70.9 | C15.1 v73,76.8 | C206.1 61.06,75.76 61.66,76.36 | U1.8 51.66,65.3